# EAGLE board Thing_Plus_ESP32_C6-Panel (EAGLE 9.6.2), part 1 of 5
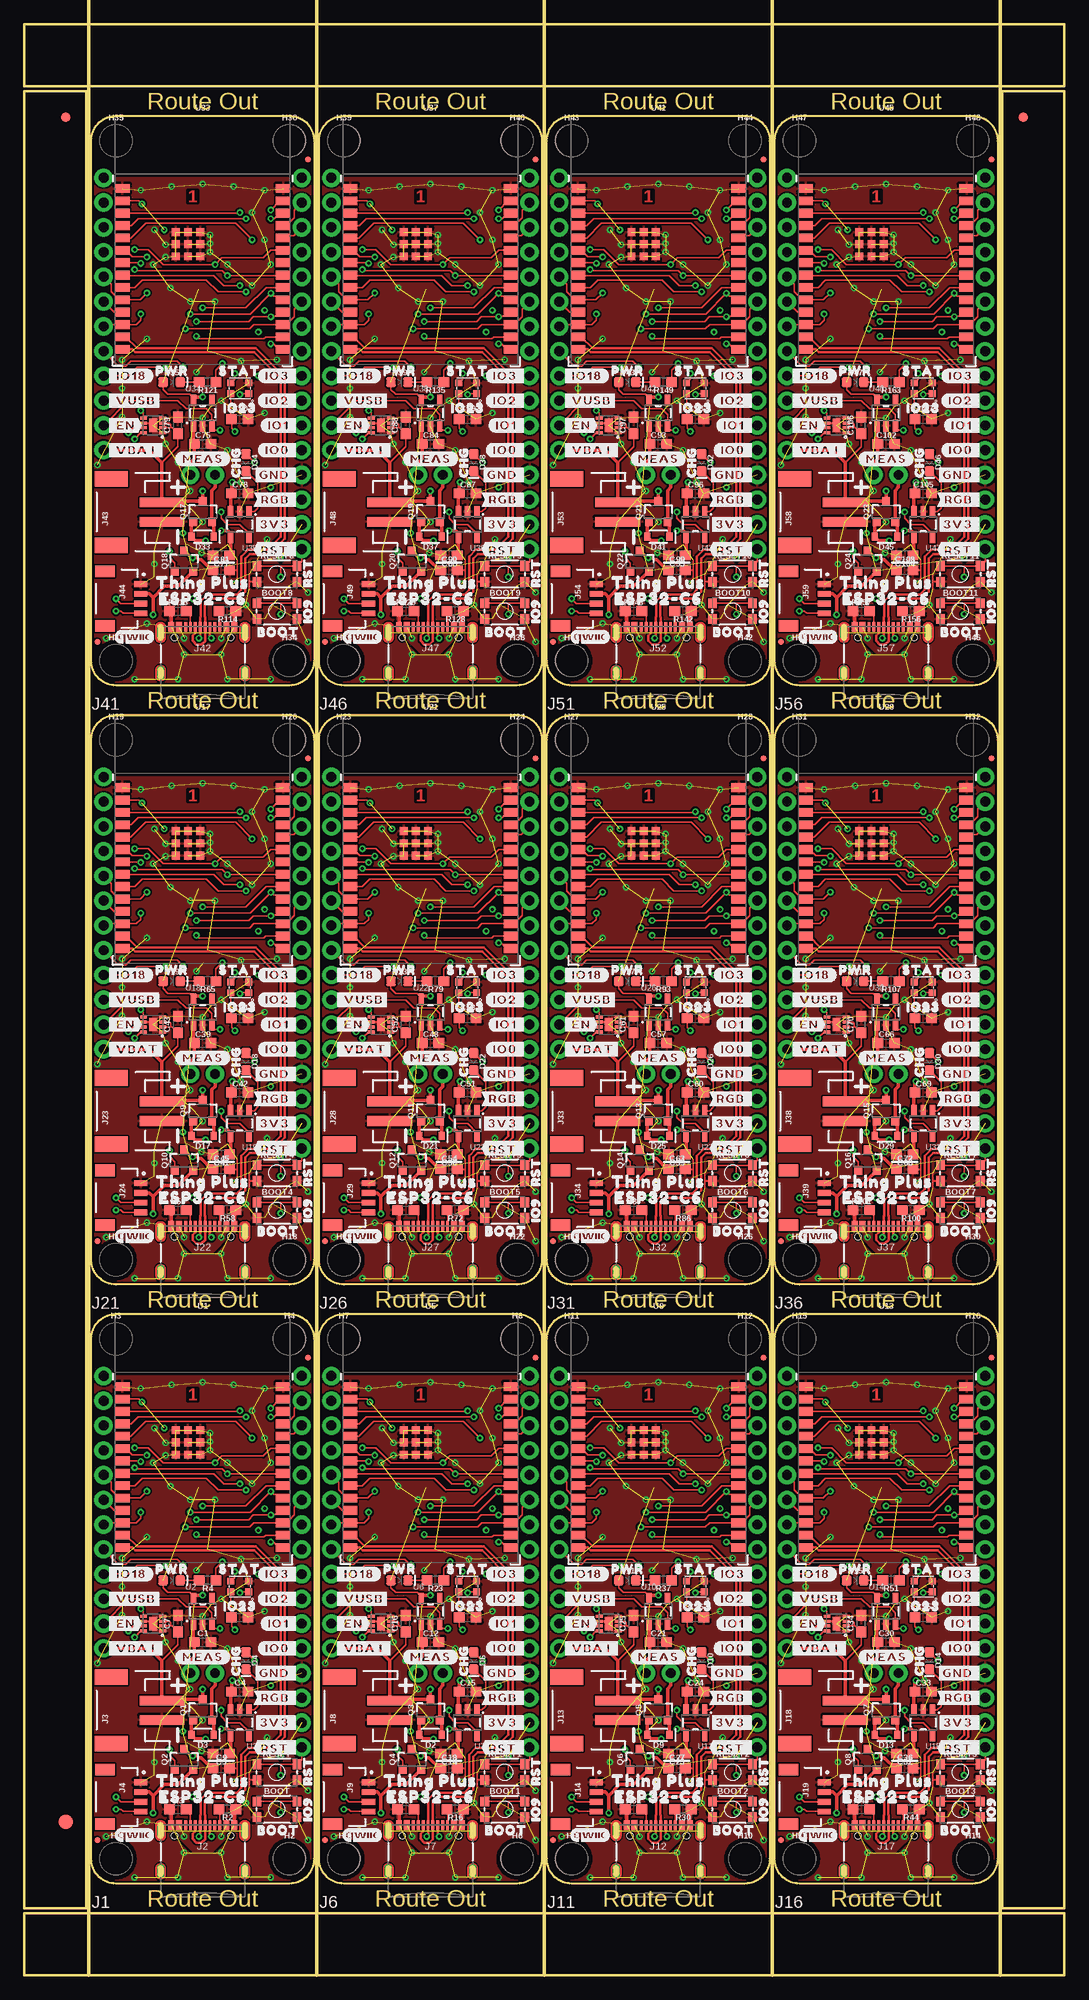
[diagram p0: board, top side]
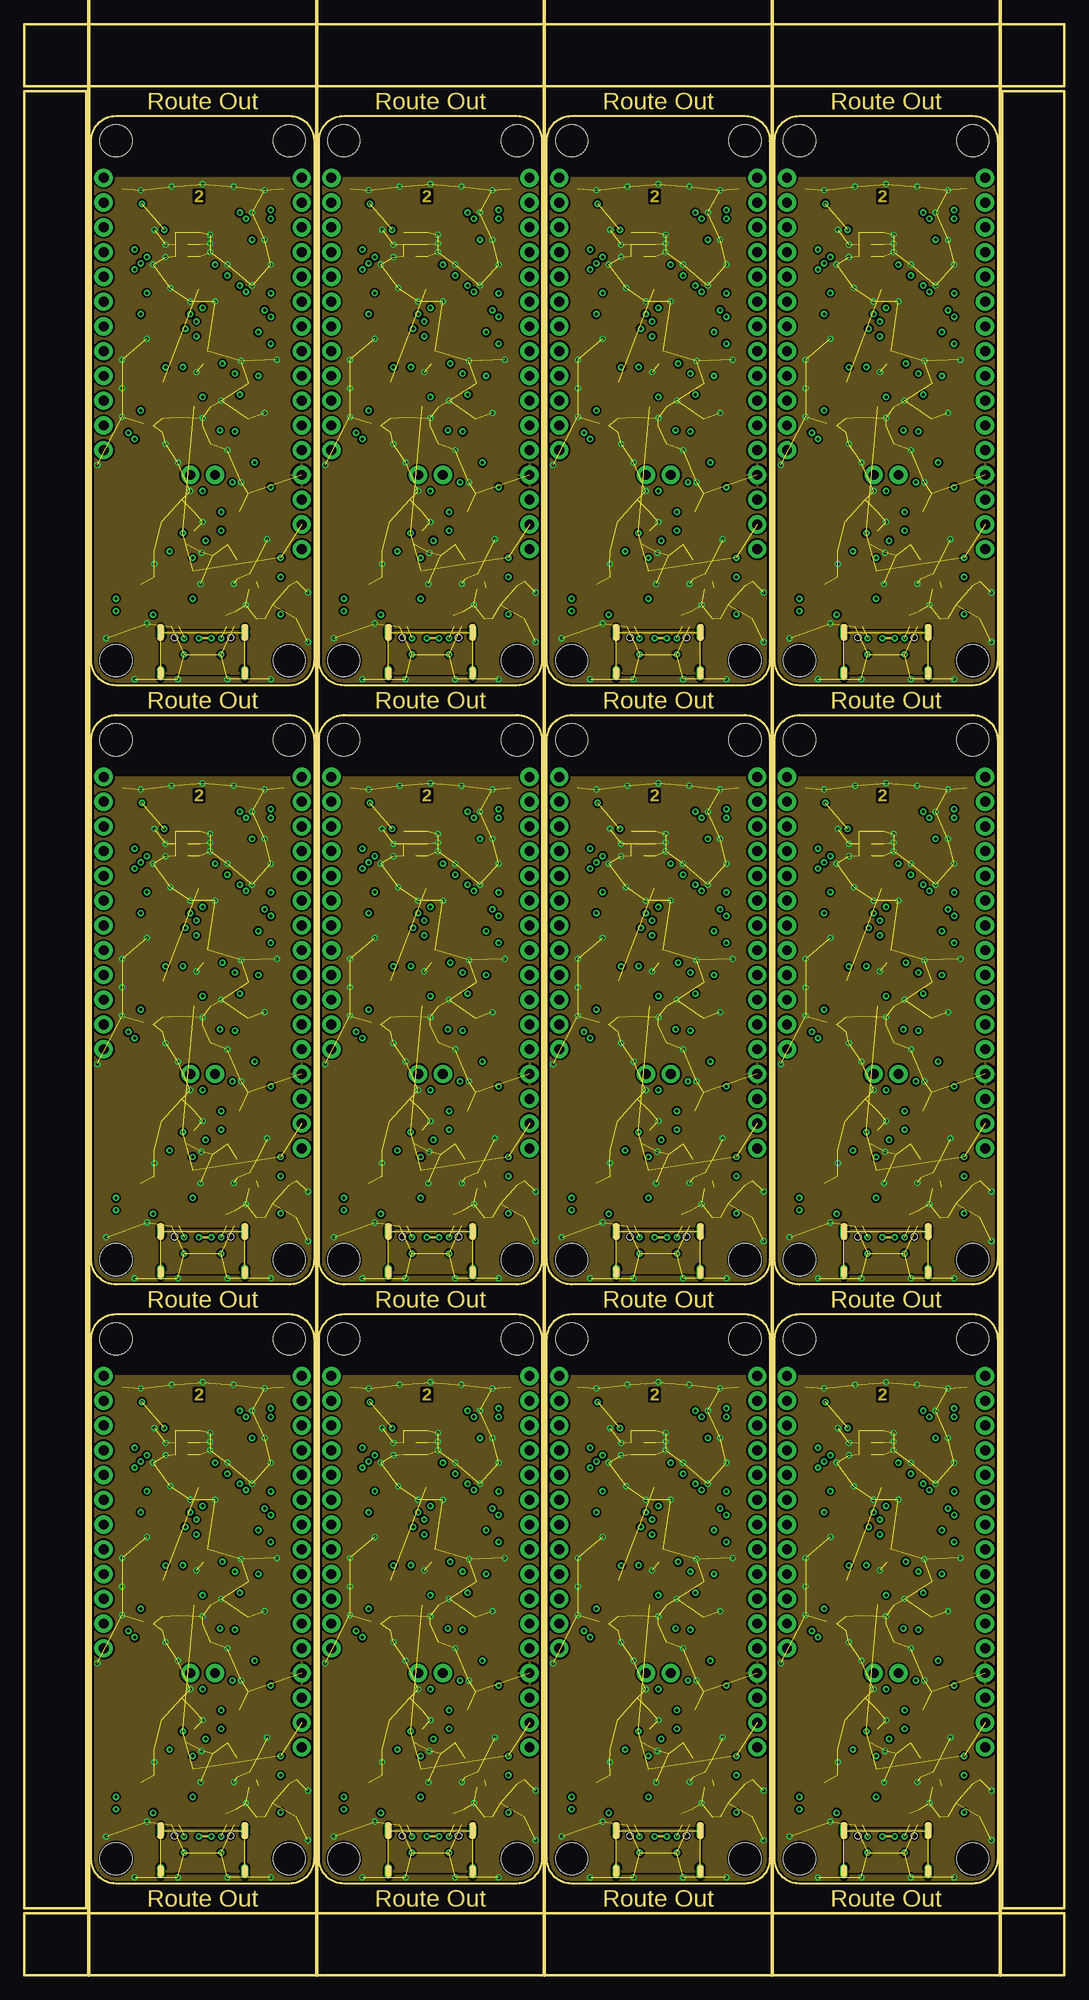
[diagram p1: board, inner layer Route2]
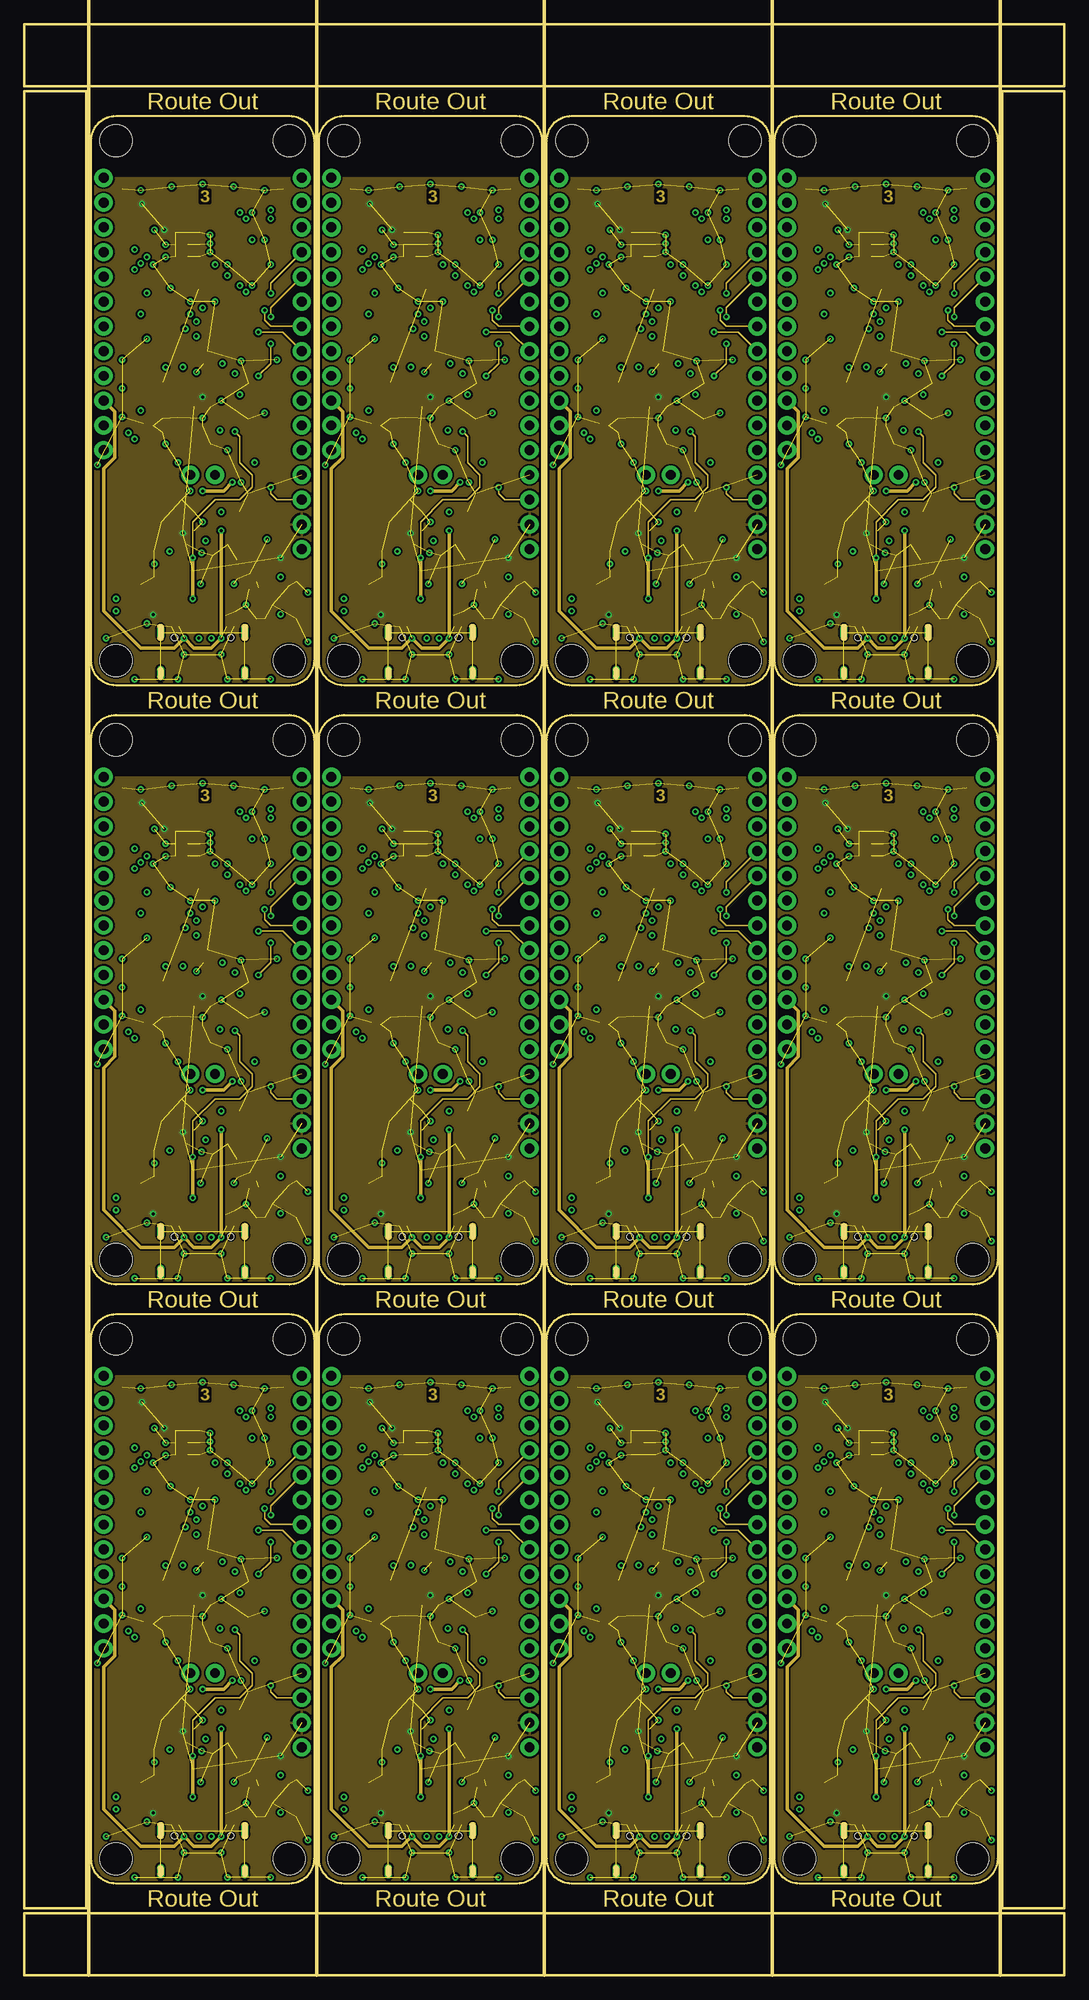
[diagram p2: board, inner layer Route15]
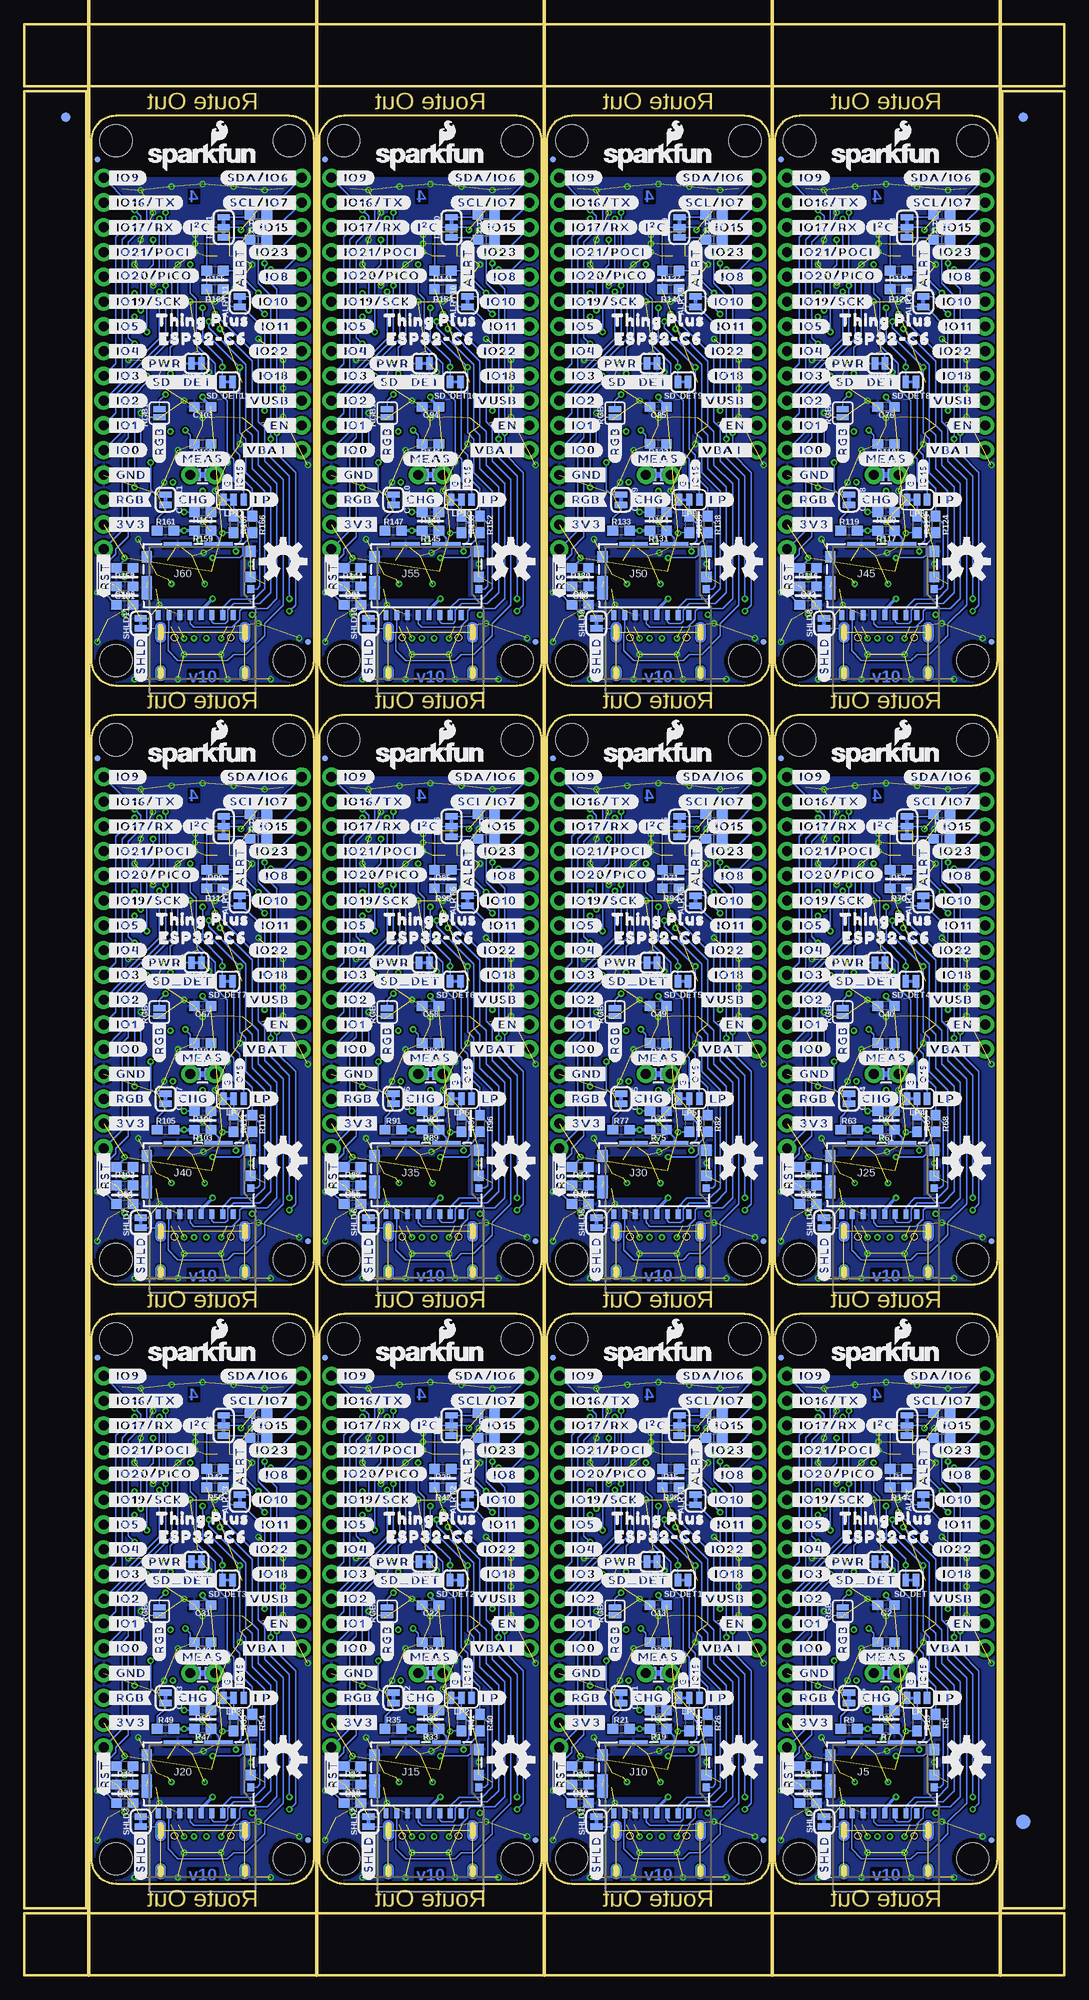
[diagram p3: board, bottom side, seen from below]

Size 106.68 x 200.15 mm. Coordinates in mm from the lower left corner, seen from the top.
Outline: 6.86,11.94 6.86,65.28 arc-90 9.4,67.82 27.18,67.82 arc-90 29.72,65.28 29.72,11.94 arc-90 27.18,9.4 9.4,9.4 arc-90 6.86,11.94
Outline: 30.23,11.94 30.23,65.28 arc-90 32.77,67.82 50.55,67.82 arc-90 53.09,65.28 53.09,11.94 arc-90 50.55,9.4 32.77,9.4 arc-90 30.23,11.94
Outline: 53.59,11.94 53.59,65.28 arc-90 56.13,67.82 73.91,67.82 arc-90 76.45,65.28 76.45,11.94 arc-90 73.91,9.4 56.13,9.4 arc-90 53.59,11.94
Outline: 76.96,11.94 76.96,65.28 arc-90 79.5,67.82 97.28,67.82 arc-90 99.82,65.28 99.82,11.94 arc-90 97.28,9.4 79.5,9.4 arc-90 76.96,11.94
Outline: 6.86,73.41 6.86,126.75 arc-90 9.4,129.29 27.18,129.29 arc-90 29.72,126.75 29.72,73.41 arc-90 27.18,70.87 9.4,70.87 arc-90 6.86,73.41
Outline: 30.23,73.41 30.23,126.75 arc-90 32.77,129.29 50.55,129.29 arc-90 53.09,126.75 53.09,73.41 arc-90 50.55,70.87 32.77,70.87 arc-90 30.23,73.41
Outline: 53.59,73.41 53.59,126.75 arc-90 56.13,129.29 73.91,129.29 arc-90 76.45,126.75 76.45,73.41 arc-90 73.91,70.87 56.13,70.87 arc-90 53.59,73.41
Outline: 76.96,73.41 76.96,126.75 arc-90 79.5,129.29 97.28,129.29 arc-90 99.82,126.75 99.82,73.41 arc-90 97.28,70.87 79.5,70.87 arc-90 76.96,73.41
Outline: 6.86,134.87 6.86,188.21 arc-90 9.4,190.75 27.18,190.75 arc-90 29.72,188.21 29.72,134.87 arc-90 27.18,132.33 9.4,132.33 arc-90 6.86,134.87
Outline: 30.23,134.87 30.23,188.21 arc-90 32.77,190.75 50.55,190.75 arc-90 53.09,188.21 53.09,134.87 arc-90 50.55,132.33 32.77,132.33 arc-90 30.23,134.87
Outline: 53.59,134.87 53.59,188.21 arc-90 56.13,190.75 73.91,190.75 arc-90 76.45,188.21 76.45,134.87 arc-90 73.91,132.33 56.13,132.33 arc-90 53.59,134.87
Outline: 76.96,134.87 76.96,188.21 arc-90 79.5,190.75 97.28,190.75 arc-90 99.82,188.21 99.82,134.87 arc-90 97.28,132.33 79.5,132.33 arc-90 76.96,134.87
Outline: 0,6.35 106.68,6.35 106.68,0 0,0 0,6.35
Outline: 100.33,193.29 106.68,193.29 106.68,6.86 100.33,6.86 100.33,193.29
Outline: 0,200.15 106.68,200.15 106.68,193.8 0,193.8 0,200.15
Outline: 0,193.29 6.35,193.29 6.35,6.86 0,6.86 0,193.29
Copper layers (1+2*15+16): Top 0.035559375mm / dielectric 0.47751875mm / Route2 0.035559375mm / dielectric 0.47751875mm / Route15 0.035559375mm / dielectric 0.47751875mm / Bottom 0.035559375mm
Design rules "Thing_Plus_ESP32_C6": minimum track width 7mil, minimum drill 12mil, track to track 7mil, track to pad 7mil, pad to pad 7mil, via to via 7mil, smd to smd 7mil, copper to edge 7mil, drill to drill 7mil, minimum pad ring 7mil, minimum via ring 7mil, stop-mask expansion 3mil, vias tented up to drill 25mil, thermal gap 10mil
Net classes: 1 USB: width 0.247 mm, clearance 0.178 mm to class 0, clearance 0.178 mm
Milling: 5 lines

## Footprints (pad centres in the part's own frame; a part is rotated, then mirrored left to right if it is on the bottom)
SMT-JUMPER_2_NC_TRACE_SILK = smd 0.66 x 1.27: 1 -0.521,0; 2 0.521,0
TACTILE_SWITCH_SMD_4.6X2.8MM = smd 0.9 x 1: 1 -2.05,-0.8; 2 2.05,-0.8; 3 2.05,0.8; 4 -2.05,0.8
0603 = smd 1.1 x 1: 1 -0.85,0; 2 0.85,0
LED-0603 = smd 1 x 1: A -0.877,0; C 0.877,0
SOD-323 = smd 0.63 x 0.83: A 1.15,0; C -1.15,0
WS2812-2020 = smd 0.7 x 0.7: DI -0.915,0.55; DO 0.915,-0.55; GND 0.915,0.55; VCC -0.915,-0.55
FIDUCIAL-1X2 = smd 1 x 1: 1 0,0
FIDUCIAL-1.5X3 = smd 1.5 x 1.5: 1 0,0
FIDUCIAL-MICRO = smd 0.635 x 0.635: 1 0,0
STAND-OFF = hole 3.302: 0,0
SMT-JUMPER_3_2-NC_TRACE_SILK = smd 0.66 x 1.27: 1 -1.041,0; 2 0,0; 3 1.041,0
THING_PLUS = drill 1.016 pad 1.88: 1 1.27,52.07; 2 1.27,49.53; 3 1.27,46.99; 4 1.27,44.45; 5 1.27,41.91; 6 1.27,39.37; 7 1.27,36.83; 8 1.27,34.29; 9 1.27,31.75; 10 1.27,29.21; 11 1.27,26.67; 12 1.27,24.13; 13 21.59,52.07; 14 21.59,49.53; 15 21.59,46.99; 16 21.59,44.45; 17 21.59,41.91; 18 21.59,39.37; 19 21.59,36.83; 20 21.59,34.29; 21 21.59,31.75; 22 21.59,29.21; 23 21.59,26.67; 24 21.59,24.13; 25 21.59,21.59; 26 21.59,19.05; 27 21.59,16.51; 28 21.59,13.97
USB-C-16P_4LAYER-PADS = smd 0.3 x 1: A5 -1.25,-0.34; A6 -0.25,-0.34; A7 0.25,-0.34; A8 1.25,-0.34; B5 1.75,-0.34; B6 0.75,-0.34; B7 -0.75,-0.34; B8 -1.75,-0.34 | smd 0.6 x 1: GND -3.225,-0.34; GND2 3.225,-0.34; VBUS1 -2.45,-0.34; VBUS2 2.45,-0.34 | drill 0.4 pad 0.6 long: SHLD1 -4.318,-0.915; SHLD2 4.318,-0.915; SHLD3 -4.318,-5.095; SHLD4 4.318,-5.095 | hole 0.65: -2.89,-1.445; 2.89,-1.445
JST-2-SMD = smd 1 x 4.6: 1 -1,-3.7; 2 1,-3.7 | smd 1.6 x 3.4: NC1 -3.4,1.5; NC2 3.4,1.5
JST04_1MM_RA = smd 0.6 x 1.35: 1 -1.5,0; 2 -0.5,0; 3 0.5,0; 4 1.5,0 | smd 1.2 x 2: NC1 2.8,-3.675; NC2 -2.8,-3.675
MICROSD_TINY = smd 0.5 x 1: 1 3.55,-3.85; 2 2.45,-3.85; 3 1.35,-3.85; 4 0.25,-3.85; 5 -0.85,-3.85; 6 -1.95,-3.85; 7 -3.05,-3.85; 8 -4.15,-3.85 | smd 0.72 x 0.78: 9 5.35,-1.17 | smd 1.05 x 1.08: GND1 5.35,0.1 | smd 1.05 x 1.2: GND2 5.35,2.71; GND3 -5.325,2.14 | smd 1.05 x 2.39: GND4 -5.325,-1.045 | smd 2.91 x 0.55: GND5 -2.145,3.385; GND6 2.045,3.385
SMT-JUMPER_3_1-NC_TRACE_SILK = smd 0.66 x 1.27: 1 -1.041,0; 2 0,0; 3 1.041,0
COMBO-JUMPER_2_NC_TRACE = smd 0.635 x 1.27: 1 -0.508,0; 2 0.508,0 | drill 1.016 pad 1.88: 3 -1.27,0; 4 1.27,0
SOT23-3 = smd 0.8 x 0.9: 1 -0.95,-1; 2 0.95,-1; 3 0,1.1
SMT-JUMPER_2_NO_SILK = smd 0.635 x 1.27: 1 -0.406,0; 2 0.406,0
ESP32-C6-WROOM-1-NARROW = smd 1.5 x 0.9: 1 -8.25,5.26; 2 -8.25,3.99; 3 -8.25,2.72; 4 -8.25,1.45; 5 -8.25,0.18; 6 -8.25,-1.09; 7 -8.25,-2.36; 8 -8.25,-3.63; 9 -8.25,-4.9; 10 -8.25,-6.17; 11 -8.25,-7.44; 12 -8.25,-8.71; 13 -8.25,-9.98; 14 -8.25,-11.25; 15 8.25,-11.25; 16 8.25,-9.98; 17 8.25,-8.71; 18 8.25,-7.44; 19 8.25,-6.17; 20 8.25,-4.9; 21 8.25,-3.63; 22 8.25,-2.36; 23 8.25,-1.09; 24 8.25,0.18; 25 8.25,1.45; 26 8.25,2.72; 27 8.25,3.99; 28 8.25,5.26 | smd 0.8 x 0.8: 29 -2.755,0.79; 30 -2.755,-0.46; 31 -2.755,-1.71; 32 -1.505,-1.71; 33 -0.255,-1.71; 34 -0.255,-0.46; 35 -0.255,0.79; 36 -1.505,0.79; 37 -1.505,-0.46
SOT23-5 = smd 0.55 x 1.2: 1 -0.95,-1.3; 2 0,-1.3; 3 0.95,-1.3; 4 0.95,1.3; 5 -0.95,1.3
DFN-8 = smd 0.3 x 0.7: 1 -0.75,-0.99; 2 -0.25,-0.99; 3 0.25,-0.99; 4 0.75,-0.99; 5 0.75,0.99; 6 0.25,0.99; 7 -0.25,0.99; 8 -0.75,0.99 | smd 1.38 x 0.8: 9 0,0

## Placement (x,y rotation side)
ALRT  JUMPER-SMT_2_NC_TRACE_SILK  [SMT-JUMPER_2_NC_TRACE_SILK]  14.48,48.77 90 bottom
ALRT1  JUMPER-SMT_2_NC_TRACE_SILK  [SMT-JUMPER_2_NC_TRACE_SILK]  37.85,48.77 90 bottom
ALRT2  JUMPER-SMT_2_NC_TRACE_SILK  [SMT-JUMPER_2_NC_TRACE_SILK]  61.21,48.77 90 bottom
ALRT3  JUMPER-SMT_2_NC_TRACE_SILK  [SMT-JUMPER_2_NC_TRACE_SILK]  84.58,48.77 90 bottom
ALRT4  JUMPER-SMT_2_NC_TRACE_SILK  [SMT-JUMPER_2_NC_TRACE_SILK]  14.48,110.24 90 bottom
ALRT5  JUMPER-SMT_2_NC_TRACE_SILK  [SMT-JUMPER_2_NC_TRACE_SILK]  37.85,110.24 90 bottom
ALRT6  JUMPER-SMT_2_NC_TRACE_SILK  [SMT-JUMPER_2_NC_TRACE_SILK]  61.21,110.24 90 bottom
ALRT7  JUMPER-SMT_2_NC_TRACE_SILK  [SMT-JUMPER_2_NC_TRACE_SILK]  84.58,110.24 90 bottom
ALRT8  JUMPER-SMT_2_NC_TRACE_SILK  [SMT-JUMPER_2_NC_TRACE_SILK]  14.48,171.7 90 bottom
ALRT9  JUMPER-SMT_2_NC_TRACE_SILK  [SMT-JUMPER_2_NC_TRACE_SILK]  37.85,171.7 90 bottom
ALRT10  JUMPER-SMT_2_NC_TRACE_SILK  [SMT-JUMPER_2_NC_TRACE_SILK]  61.21,171.7 90 bottom
ALRT11  JUMPER-SMT_2_NC_TRACE_SILK  [SMT-JUMPER_2_NC_TRACE_SILK]  84.58,171.7 90 bottom
BOOT  MOMENTARY-SWITCH-SPST-SMD-4.6X2.8MM  [TACTILE_SWITCH_SMD_4.6X2.8MM]  25.91,17.02 0 top
BOOT1  MOMENTARY-SWITCH-SPST-SMD-4.6X2.8MM  [TACTILE_SWITCH_SMD_4.6X2.8MM]  49.28,17.02 0 top
BOOT2  MOMENTARY-SWITCH-SPST-SMD-4.6X2.8MM  [TACTILE_SWITCH_SMD_4.6X2.8MM]  72.64,17.02 0 top
BOOT3  MOMENTARY-SWITCH-SPST-SMD-4.6X2.8MM  [TACTILE_SWITCH_SMD_4.6X2.8MM]  96.01,17.02 0 top
BOOT4  MOMENTARY-SWITCH-SPST-SMD-4.6X2.8MM  [TACTILE_SWITCH_SMD_4.6X2.8MM]  25.91,78.49 0 top
BOOT5  MOMENTARY-SWITCH-SPST-SMD-4.6X2.8MM  [TACTILE_SWITCH_SMD_4.6X2.8MM]  49.28,78.49 0 top
BOOT6  MOMENTARY-SWITCH-SPST-SMD-4.6X2.8MM  [TACTILE_SWITCH_SMD_4.6X2.8MM]  72.64,78.49 0 top
BOOT7  MOMENTARY-SWITCH-SPST-SMD-4.6X2.8MM  [TACTILE_SWITCH_SMD_4.6X2.8MM]  96.01,78.49 0 top
BOOT8  MOMENTARY-SWITCH-SPST-SMD-4.6X2.8MM  [TACTILE_SWITCH_SMD_4.6X2.8MM]  25.91,139.95 0 top
BOOT9  MOMENTARY-SWITCH-SPST-SMD-4.6X2.8MM  [TACTILE_SWITCH_SMD_4.6X2.8MM]  49.28,139.95 0 top
BOOT10  MOMENTARY-SWITCH-SPST-SMD-4.6X2.8MM  [TACTILE_SWITCH_SMD_4.6X2.8MM]  72.64,139.95 0 top
BOOT11  MOMENTARY-SWITCH-SPST-SMD-4.6X2.8MM  [TACTILE_SWITCH_SMD_4.6X2.8MM]  96.01,139.95 0 top
C1  2.2uF  [0603]  18.29,34.16 0 top
C2  2.2uF  [0603]  18.29,37.97 180 bottom
C3  2.2uF  [0603]  20.19,22.73 180 top
C4  2.2uF  [0603]  22.1,29.08 0 top
C5  0.1uF  [0603]  26.29,19.56 180 bottom
C6  DNP  [0603]  26.29,17.65 0 bottom
C7  0.1uF  [0603]  15.75,36.07 90 top
C8  0.1uF  [0603]  22.1,36.7 0 top
C9  10uF  [0603]  20.19,21.21 0 top
C10  0.1uF  [0603]  49.66,19.56 180 bottom
C11  DNP  [0603]  49.66,17.65 0 bottom
C12  2.2uF  [0603]  41.66,34.16 0 top
C13  2.2uF  [0603]  41.66,37.97 180 bottom
C14  2.2uF  [0603]  43.56,22.73 180 top
C15  2.2uF  [0603]  45.47,29.08 0 top
C16  0.1uF  [0603]  39.12,36.07 90 top
C17  0.1uF  [0603]  45.47,36.7 0 top
C18  10uF  [0603]  43.56,21.21 0 top
C19  0.1uF  [0603]  73.03,19.56 180 bottom
C20  DNP  [0603]  73.03,17.65 0 bottom
C21  2.2uF  [0603]  65.02,34.16 0 top
C22  2.2uF  [0603]  65.02,37.97 180 bottom
C23  2.2uF  [0603]  66.93,22.73 180 top
C24  2.2uF  [0603]  68.83,29.08 0 top
C25  0.1uF  [0603]  62.48,36.07 90 top
C26  0.1uF  [0603]  68.83,36.7 0 top
C27  10uF  [0603]  66.93,21.21 0 top
C28  0.1uF  [0603]  96.39,19.56 180 bottom
C29  DNP  [0603]  96.39,17.65 0 bottom
C30  2.2uF  [0603]  88.39,34.16 0 top
C31  2.2uF  [0603]  88.39,37.97 180 bottom
C32  2.2uF  [0603]  90.3,22.73 180 top
C33  2.2uF  [0603]  92.2,29.08 0 top
C34  0.1uF  [0603]  85.85,36.07 90 top
C35  0.1uF  [0603]  92.2,36.7 0 top
C36  10uF  [0603]  90.3,21.21 0 top
C37  0.1uF  [0603]  26.29,81.03 180 bottom
C38  DNP  [0603]  26.29,79.12 0 bottom
C39  2.2uF  [0603]  18.29,95.63 0 top
C40  2.2uF  [0603]  18.29,99.44 180 bottom
C41  2.2uF  [0603]  20.19,84.2 180 top
C42  2.2uF  [0603]  22.1,90.55 0 top
C43  0.1uF  [0603]  15.75,97.54 90 top
C44  0.1uF  [0603]  22.1,98.17 0 top
C45  10uF  [0603]  20.19,82.68 0 top
C46  0.1uF  [0603]  49.66,81.03 180 bottom
C47  DNP  [0603]  49.66,79.12 0 bottom
C48  2.2uF  [0603]  41.66,95.63 0 top
C49  2.2uF  [0603]  41.66,99.44 180 bottom
C50  2.2uF  [0603]  43.56,84.2 180 top
C51  2.2uF  [0603]  45.47,90.55 0 top
C52  0.1uF  [0603]  39.12,97.54 90 top
C53  0.1uF  [0603]  45.47,98.17 0 top
C54  10uF  [0603]  43.56,82.68 0 top
C55  0.1uF  [0603]  73.03,81.03 180 bottom
C56  DNP  [0603]  73.03,79.12 0 bottom
C57  2.2uF  [0603]  65.02,95.63 0 top
C58  2.2uF  [0603]  65.02,99.44 180 bottom
C59  2.2uF  [0603]  66.93,84.2 180 top
C60  2.2uF  [0603]  68.83,90.55 0 top
C61  0.1uF  [0603]  62.48,97.54 90 top
C62  0.1uF  [0603]  68.83,98.17 0 top
C63  10uF  [0603]  66.93,82.68 0 top
C64  0.1uF  [0603]  96.39,81.03 180 bottom
C65  DNP  [0603]  96.39,79.12 0 bottom
C66  2.2uF  [0603]  88.39,95.63 0 top
C67  2.2uF  [0603]  88.39,99.44 180 bottom
C68  2.2uF  [0603]  90.3,84.2 180 top
C69  2.2uF  [0603]  92.2,90.55 0 top
C70  0.1uF  [0603]  85.85,97.54 90 top
C71  0.1uF  [0603]  92.2,98.17 0 top
C72  10uF  [0603]  90.3,82.68 0 top
C73  0.1uF  [0603]  26.29,142.49 180 bottom
C74  DNP  [0603]  26.29,140.59 0 bottom
C75  2.2uF  [0603]  18.29,157.1 0 top
C76  2.2uF  [0603]  18.29,160.91 180 bottom
C77  2.2uF  [0603]  20.19,145.67 180 top
C78  2.2uF  [0603]  22.1,152.02 0 top
C79  0.1uF  [0603]  15.75,159 90 top
C80  0.1uF  [0603]  22.1,159.64 0 top
C81  10uF  [0603]  20.19,144.15 0 top
C82  0.1uF  [0603]  49.66,142.49 180 bottom
C83  DNP  [0603]  49.66,140.59 0 bottom
C84  2.2uF  [0603]  41.66,157.1 0 top
C85  2.2uF  [0603]  41.66,160.91 180 bottom
C86  2.2uF  [0603]  43.56,145.67 180 top
C87  2.2uF  [0603]  45.47,152.02 0 top
C88  0.1uF  [0603]  39.12,159 90 top
C89  0.1uF  [0603]  45.47,159.64 0 top
C90  10uF  [0603]  43.56,144.15 0 top
C91  0.1uF  [0603]  73.03,142.49 180 bottom
C92  DNP  [0603]  73.03,140.59 0 bottom
C93  2.2uF  [0603]  65.02,157.1 0 top
C94  2.2uF  [0603]  65.02,160.91 180 bottom
C95  2.2uF  [0603]  66.93,145.67 180 top
C96  2.2uF  [0603]  68.83,152.02 0 top
C97  0.1uF  [0603]  62.48,159 90 top
C98  0.1uF  [0603]  68.83,159.64 0 top
C99  10uF  [0603]  66.93,144.15 0 top
C100  0.1uF  [0603]  96.39,142.49 180 bottom
C101  DNP  [0603]  96.39,140.59 0 bottom
C102  2.2uF  [0603]  88.39,157.1 0 top
C103  2.2uF  [0603]  88.39,160.91 180 bottom
C104  2.2uF  [0603]  90.3,145.67 180 top
C105  2.2uF  [0603]  92.2,152.02 0 top
C106  0.1uF  [0603]  85.85,159 90 top
C107  0.1uF  [0603]  92.2,159.64 0 top
C108  10uF  [0603]  90.3,144.15 0 top
CHG  JUMPER-SMT_2_NC_TRACE_SILK  [SMT-JUMPER_2_NC_TRACE_SILK]  22.1,28.45 270 bottom
CHG1  JUMPER-SMT_2_NC_TRACE_SILK  [SMT-JUMPER_2_NC_TRACE_SILK]  45.47,28.45 270 bottom
CHG2  JUMPER-SMT_2_NC_TRACE_SILK  [SMT-JUMPER_2_NC_TRACE_SILK]  68.83,28.45 270 bottom
CHG3  JUMPER-SMT_2_NC_TRACE_SILK  [SMT-JUMPER_2_NC_TRACE_SILK]  92.2,28.45 270 bottom
CHG4  JUMPER-SMT_2_NC_TRACE_SILK  [SMT-JUMPER_2_NC_TRACE_SILK]  22.1,89.92 270 bottom
CHG5  JUMPER-SMT_2_NC_TRACE_SILK  [SMT-JUMPER_2_NC_TRACE_SILK]  45.47,89.92 270 bottom
CHG6  JUMPER-SMT_2_NC_TRACE_SILK  [SMT-JUMPER_2_NC_TRACE_SILK]  68.83,89.92 270 bottom
CHG7  JUMPER-SMT_2_NC_TRACE_SILK  [SMT-JUMPER_2_NC_TRACE_SILK]  92.2,89.92 270 bottom
CHG8  JUMPER-SMT_2_NC_TRACE_SILK  [SMT-JUMPER_2_NC_TRACE_SILK]  22.1,151.38 270 bottom
CHG9  JUMPER-SMT_2_NC_TRACE_SILK  [SMT-JUMPER_2_NC_TRACE_SILK]  45.47,151.38 270 bottom
CHG10  JUMPER-SMT_2_NC_TRACE_SILK  [SMT-JUMPER_2_NC_TRACE_SILK]  68.83,151.38 270 bottom
CHG11  JUMPER-SMT_2_NC_TRACE_SILK  [SMT-JUMPER_2_NC_TRACE_SILK]  92.2,151.38 270 bottom
D1  [LED-0603]  15.11,40.51 0 top
D2  1A/23V/620mV  [SOD-323]  41.66,24.64 180 top
D3  1A/23V/620mV  [SOD-323]  18.29,24.64 180 top
D4  Yellow  [LED-0603]  22.73,32.26 270 top
D5  WS2812_2020  [WS2812-2020]  22.1,39.88 0 top
D6  Yellow  [LED-0603]  46.1,32.26 270 top
D7  [LED-0603]  38.48,40.51 0 top
D8  WS2812_2020  [WS2812-2020]  45.47,39.88 0 top
D9  1A/23V/620mV  [SOD-323]  65.02,24.64 180 top
D10  Yellow  [LED-0603]  69.47,32.26 270 top
D11  [LED-0603]  61.85,40.51 0 top
D12  WS2812_2020  [WS2812-2020]  68.83,39.88 0 top
D13  1A/23V/620mV  [SOD-323]  88.39,24.64 180 top
D14  Yellow  [LED-0603]  92.84,32.26 270 top
D15  [LED-0603]  85.22,40.51 0 top
D16  WS2812_2020  [WS2812-2020]  92.2,39.88 0 top
D17  1A/23V/620mV  [SOD-323]  18.29,86.11 180 top
D18  Yellow  [LED-0603]  22.73,93.73 270 top
D19  [LED-0603]  15.11,101.98 0 top
D20  WS2812_2020  [WS2812-2020]  22.1,101.35 0 top
D21  1A/23V/620mV  [SOD-323]  41.66,86.11 180 top
D22  Yellow  [LED-0603]  46.1,93.73 270 top
D23  [LED-0603]  38.48,101.98 0 top
D24  WS2812_2020  [WS2812-2020]  45.47,101.35 0 top
D25  1A/23V/620mV  [SOD-323]  65.02,86.11 180 top
D26  Yellow  [LED-0603]  69.47,93.73 270 top
D27  [LED-0603]  61.85,101.98 0 top
D28  WS2812_2020  [WS2812-2020]  68.83,101.35 0 top
D29  1A/23V/620mV  [SOD-323]  88.39,86.11 180 top
D30  Yellow  [LED-0603]  92.84,93.73 270 top
D31  [LED-0603]  85.22,101.98 0 top
D32  WS2812_2020  [WS2812-2020]  92.2,101.35 0 top
D33  1A/23V/620mV  [SOD-323]  18.29,147.57 180 top
D34  Yellow  [LED-0603]  22.73,155.19 270 top
D35  [LED-0603]  15.11,163.45 0 top
D36  WS2812_2020  [WS2812-2020]  22.1,162.81 0 top
D37  1A/23V/620mV  [SOD-323]  41.66,147.57 180 top
D38  Yellow  [LED-0603]  46.1,155.19 270 top
D39  [LED-0603]  38.48,163.45 0 top
D40  WS2812_2020  [WS2812-2020]  45.47,162.81 0 top
D41  1A/23V/620mV  [SOD-323]  65.02,147.57 180 top
D42  Yellow  [LED-0603]  69.47,155.19 270 top
D43  [LED-0603]  61.85,163.45 0 top
D44  WS2812_2020  [WS2812-2020]  68.83,162.81 0 top
D45  1A/23V/620mV  [SOD-323]  88.39,147.57 180 top
D46  Yellow  [LED-0603]  92.84,155.19 270 top
D47  [LED-0603]  85.22,163.45 0 top
D48  WS2812_2020  [WS2812-2020]  92.2,162.81 0 top
E$1  [FIDUCIAL-1X2]  4.23,190.63 0 top
E$2  [FIDUCIAL-1X2]  4.23,190.63 0 bottom
E$3  [FIDUCIAL-1X2]  102.45,190.63 0 top
E$4  [FIDUCIAL-1X2]  102.45,190.63 0 bottom
E$5  [FIDUCIAL-1.5X3]  4.23,15.75 0 top
E$6  [FIDUCIAL-1.5X3]  4.23,15.75 0 bottom
FD1  FIDUCIALUFIDUCIAL  [FIDUCIAL-MICRO]  29.08,63.37 0 top
FD2  FIDUCIALUFIDUCIAL  [FIDUCIAL-MICRO]  29.08,63.37 0 bottom
FD3  FIDUCIALUFIDUCIAL  [FIDUCIAL-MICRO]  7.49,13.84 0 top
FD4  FIDUCIALUFIDUCIAL  [FIDUCIAL-MICRO]  7.49,13.84 0 bottom
FD5  FIDUCIALUFIDUCIAL  [FIDUCIAL-MICRO]  52.45,63.37 0 top
FD6  FIDUCIALUFIDUCIAL  [FIDUCIAL-MICRO]  52.45,63.37 0 bottom
FD7  FIDUCIALUFIDUCIAL  [FIDUCIAL-MICRO]  30.86,13.84 0 top
FD8  FIDUCIALUFIDUCIAL  [FIDUCIAL-MICRO]  30.86,13.84 0 bottom
FD9  FIDUCIALUFIDUCIAL  [FIDUCIAL-MICRO]  75.82,63.37 0 top
FD10  FIDUCIALUFIDUCIAL  [FIDUCIAL-MICRO]  75.82,63.37 0 bottom
FD11  FIDUCIALUFIDUCIAL  [FIDUCIAL-MICRO]  54.23,13.84 0 top
FD12  FIDUCIALUFIDUCIAL  [FIDUCIAL-MICRO]  54.23,13.84 0 bottom
FD13  FIDUCIALUFIDUCIAL  [FIDUCIAL-MICRO]  99.19,63.37 0 top
FD14  FIDUCIALUFIDUCIAL  [FIDUCIAL-MICRO]  99.19,63.37 0 bottom
FD15  FIDUCIALUFIDUCIAL  [FIDUCIAL-MICRO]  77.6,13.84 0 top
FD16  FIDUCIALUFIDUCIAL  [FIDUCIAL-MICRO]  77.6,13.84 0 bottom
FD17  FIDUCIALUFIDUCIAL  [FIDUCIAL-MICRO]  29.08,124.84 0 top
FD18  FIDUCIALUFIDUCIAL  [FIDUCIAL-MICRO]  29.08,124.84 0 bottom
FD19  FIDUCIALUFIDUCIAL  [FIDUCIAL-MICRO]  7.49,75.31 0 top
FD20  FIDUCIALUFIDUCIAL  [FIDUCIAL-MICRO]  7.49,75.31 0 bottom
FD21  FIDUCIALUFIDUCIAL  [FIDUCIAL-MICRO]  52.45,124.84 0 top
FD22  FIDUCIALUFIDUCIAL  [FIDUCIAL-MICRO]  52.45,124.84 0 bottom
FD23  FIDUCIALUFIDUCIAL  [FIDUCIAL-MICRO]  30.86,75.31 0 top
FD24  FIDUCIALUFIDUCIAL  [FIDUCIAL-MICRO]  30.86,75.31 0 bottom
FD25  FIDUCIALUFIDUCIAL  [FIDUCIAL-MICRO]  75.82,124.84 0 top
FD26  FIDUCIALUFIDUCIAL  [FIDUCIAL-MICRO]  75.82,124.84 0 bottom
FD27  FIDUCIALUFIDUCIAL  [FIDUCIAL-MICRO]  54.23,75.31 0 top
FD28  FIDUCIALUFIDUCIAL  [FIDUCIAL-MICRO]  54.23,75.31 0 bottom
FD29  FIDUCIALUFIDUCIAL  [FIDUCIAL-MICRO]  99.19,124.84 0 top
FD30  FIDUCIALUFIDUCIAL  [FIDUCIAL-MICRO]  99.19,124.84 0 bottom
FD31  FIDUCIALUFIDUCIAL  [FIDUCIAL-MICRO]  77.6,75.31 0 top
FD32  FIDUCIALUFIDUCIAL  [FIDUCIAL-MICRO]  77.6,75.31 0 bottom
FD33  FIDUCIALUFIDUCIAL  [FIDUCIAL-MICRO]  29.08,186.31 0 top
FD34  FIDUCIALUFIDUCIAL  [FIDUCIAL-MICRO]  29.08,186.31 0 bottom
FD35  FIDUCIALUFIDUCIAL  [FIDUCIAL-MICRO]  7.49,136.78 0 top
FD36  FIDUCIALUFIDUCIAL  [FIDUCIAL-MICRO]  7.49,136.78 0 bottom
FD37  FIDUCIALUFIDUCIAL  [FIDUCIAL-MICRO]  52.45,186.31 0 top
FD38  FIDUCIALUFIDUCIAL  [FIDUCIAL-MICRO]  52.45,186.31 0 bottom
FD39  FIDUCIALUFIDUCIAL  [FIDUCIAL-MICRO]  30.86,136.78 0 top
FD40  FIDUCIALUFIDUCIAL  [FIDUCIAL-MICRO]  30.86,136.78 0 bottom
FD41  FIDUCIALUFIDUCIAL  [FIDUCIAL-MICRO]  75.82,186.31 0 top
FD42  FIDUCIALUFIDUCIAL  [FIDUCIAL-MICRO]  75.82,186.31 0 bottom
FD43  FIDUCIALUFIDUCIAL  [FIDUCIAL-MICRO]  54.23,136.78 0 top
FD44  FIDUCIALUFIDUCIAL  [FIDUCIAL-MICRO]  54.23,136.78 0 bottom
FD45  FIDUCIALUFIDUCIAL  [FIDUCIAL-MICRO]  99.19,186.31 0 top
FD46  FIDUCIALUFIDUCIAL  [FIDUCIAL-MICRO]  99.19,186.31 0 bottom
FD47  FIDUCIALUFIDUCIAL  [FIDUCIAL-MICRO]  77.6,136.78 0 top
FD48  FIDUCIALUFIDUCIAL  [FIDUCIAL-MICRO]  77.6,136.78 0 bottom
H1  STAND-OFF  [STAND-OFF]  9.4,11.94 0 top
H2  STAND-OFF  [STAND-OFF]  27.18,11.94 0 top
H3  STAND-OFF  [STAND-OFF]  9.4,65.28 0 top
H4  STAND-OFF  [STAND-OFF]  27.18,65.28 0 top
H5  STAND-OFF  [STAND-OFF]  32.77,11.94 0 top
H6  STAND-OFF  [STAND-OFF]  50.55,11.94 0 top
H7  STAND-OFF  [STAND-OFF]  32.77,65.28 0 top
H8  STAND-OFF  [STAND-OFF]  50.55,65.28 0 top
H9  STAND-OFF  [STAND-OFF]  56.13,11.94 0 top
H10  STAND-OFF  [STAND-OFF]  73.91,11.94 0 top
H11  STAND-OFF  [STAND-OFF]  56.13,65.28 0 top
H12  STAND-OFF  [STAND-OFF]  73.91,65.28 0 top
H13  STAND-OFF  [STAND-OFF]  79.5,11.94 0 top
H14  STAND-OFF  [STAND-OFF]  97.28,11.94 0 top
H15  STAND-OFF  [STAND-OFF]  79.5,65.28 0 top
H16  STAND-OFF  [STAND-OFF]  97.28,65.28 0 top
H17  STAND-OFF  [STAND-OFF]  9.4,73.41 0 top
H18  STAND-OFF  [STAND-OFF]  27.18,73.41 0 top
H19  STAND-OFF  [STAND-OFF]  9.4,126.75 0 top
H20  STAND-OFF  [STAND-OFF]  27.18,126.75 0 top
H21  STAND-OFF  [STAND-OFF]  32.77,73.41 0 top
H22  STAND-OFF  [STAND-OFF]  50.55,73.41 0 top
H23  STAND-OFF  [STAND-OFF]  32.77,126.75 0 top
H24  STAND-OFF  [STAND-OFF]  50.55,126.75 0 top
H25  STAND-OFF  [STAND-OFF]  56.13,73.41 0 top
H26  STAND-OFF  [STAND-OFF]  73.91,73.41 0 top
H27  STAND-OFF  [STAND-OFF]  56.13,126.75 0 top
H28  STAND-OFF  [STAND-OFF]  73.91,126.75 0 top
H29  STAND-OFF  [STAND-OFF]  79.5,73.41 0 top
H30  STAND-OFF  [STAND-OFF]  97.28,73.41 0 top
H31  STAND-OFF  [STAND-OFF]  79.5,126.75 0 top
H32  STAND-OFF  [STAND-OFF]  97.28,126.75 0 top
H33  STAND-OFF  [STAND-OFF]  9.4,134.87 0 top
H34  STAND-OFF  [STAND-OFF]  27.18,134.87 0 top
H35  STAND-OFF  [STAND-OFF]  9.4,188.21 0 top
H36  STAND-OFF  [STAND-OFF]  27.18,188.21 0 top
H37  STAND-OFF  [STAND-OFF]  32.77,134.87 0 top
H38  STAND-OFF  [STAND-OFF]  50.55,134.87 0 top
H39  STAND-OFF  [STAND-OFF]  32.77,188.21 0 top
H40  STAND-OFF  [STAND-OFF]  50.55,188.21 0 top
H41  STAND-OFF  [STAND-OFF]  56.13,134.87 0 top
H42  STAND-OFF  [STAND-OFF]  73.91,134.87 0 top
H43  STAND-OFF  [STAND-OFF]  56.13,188.21 0 top
H44  STAND-OFF  [STAND-OFF]  73.91,188.21 0 top
H45  STAND-OFF  [STAND-OFF]  79.5,134.87 0 top
H46  STAND-OFF  [STAND-OFF]  97.28,134.87 0 top
H47  STAND-OFF  [STAND-OFF]  79.5,188.21 0 top
H48  STAND-OFF  [STAND-OFF]  97.28,188.21 0 top
I2C  JUMPER-SMT_3_2-NC_TRACE_SILK  [SMT-JUMPER_3_2-NC_TRACE_SILK]  16.13,56.39 90 bottom
I2C1  JUMPER-SMT_3_2-NC_TRACE_SILK  [SMT-JUMPER_3_2-NC_TRACE_SILK]  39.5,56.39 90 bottom
I2C2  JUMPER-SMT_3_2-NC_TRACE_SILK  [SMT-JUMPER_3_2-NC_TRACE_SILK]  62.86,56.39 90 bottom
I2C3  JUMPER-SMT_3_2-NC_TRACE_SILK  [SMT-JUMPER_3_2-NC_TRACE_SILK]  86.23,56.39 90 bottom
I2C4  JUMPER-SMT_3_2-NC_TRACE_SILK  [SMT-JUMPER_3_2-NC_TRACE_SILK]  16.13,117.86 90 bottom
I2C5  JUMPER-SMT_3_2-NC_TRACE_SILK  [SMT-JUMPER_3_2-NC_TRACE_SILK]  39.5,117.86 90 bottom
I2C6  JUMPER-SMT_3_2-NC_TRACE_SILK  [SMT-JUMPER_3_2-NC_TRACE_SILK]  62.86,117.86 90 bottom
I2C7  JUMPER-SMT_3_2-NC_TRACE_SILK  [SMT-JUMPER_3_2-NC_TRACE_SILK]  86.23,117.86 90 bottom
I2C8  JUMPER-SMT_3_2-NC_TRACE_SILK  [SMT-JUMPER_3_2-NC_TRACE_SILK]  16.13,179.32 90 bottom
I2C9  JUMPER-SMT_3_2-NC_TRACE_SILK  [SMT-JUMPER_3_2-NC_TRACE_SILK]  39.5,179.32 90 bottom
I2C10  JUMPER-SMT_3_2-NC_TRACE_SILK  [SMT-JUMPER_3_2-NC_TRACE_SILK]  62.86,179.32 90 bottom
I2C11  JUMPER-SMT_3_2-NC_TRACE_SILK  [SMT-JUMPER_3_2-NC_TRACE_SILK]  86.23,179.32 90 bottom
J1  THING_PLUS_LOGICAL  [THING_PLUS]  6.86,9.4 0 top
J2  [USB-C-16P_4LAYER-PADS]  18.29,15.75 0 top
J3  [JST-2-SMD]  10.41,27.18 90 top
J4  QWIIC_RIGHT_ANGLE  [JST04_1MM_RA]  11.94,18.29 270 top
J5  MICRO-SDFRICTION  [MICROSD_TINY]  18.69,20.45 0 bottom
J6  THING_PLUS_LOGICAL  [THING_PLUS]  30.23,9.4 0 top
J7  [USB-C-16P_4LAYER-PADS]  41.66,15.75 0 top
J8  [JST-2-SMD]  33.78,27.18 90 top
J9  QWIIC_RIGHT_ANGLE  [JST04_1MM_RA]  35.31,18.29 270 top
J10  MICRO-SDFRICTION  [MICROSD_TINY]  42.06,20.45 0 bottom
J11  THING_PLUS_LOGICAL  [THING_PLUS]  53.59,9.4 0 top
J12  [USB-C-16P_4LAYER-PADS]  65.02,15.75 0 top
J13  [JST-2-SMD]  57.15,27.18 90 top
J14  QWIIC_RIGHT_ANGLE  [JST04_1MM_RA]  58.67,18.29 270 top
J15  MICRO-SDFRICTION  [MICROSD_TINY]  65.43,20.45 0 bottom
J16  THING_PLUS_LOGICAL  [THING_PLUS]  76.96,9.4 0 top
J17  [USB-C-16P_4LAYER-PADS]  88.39,15.75 0 top
J18  [JST-2-SMD]  80.52,27.18 90 top
J19  QWIIC_RIGHT_ANGLE  [JST04_1MM_RA]  82.04,18.29 270 top
J20  MICRO-SDFRICTION  [MICROSD_TINY]  88.8,20.45 0 bottom
J21  THING_PLUS_LOGICAL  [THING_PLUS]  6.86,70.87 0 top
J22  [USB-C-16P_4LAYER-PADS]  18.29,77.22 0 top
J23  [JST-2-SMD]  10.41,88.65 90 top
J24  QWIIC_RIGHT_ANGLE  [JST04_1MM_RA]  11.94,79.76 270 top
J25  MICRO-SDFRICTION  [MICROSD_TINY]  18.69,81.91 0 bottom
J26  THING_PLUS_LOGICAL  [THING_PLUS]  30.23,70.87 0 top
J27  [USB-C-16P_4LAYER-PADS]  41.66,77.22 0 top
J28  [JST-2-SMD]  33.78,88.65 90 top
J29  QWIIC_RIGHT_ANGLE  [JST04_1MM_RA]  35.31,79.76 270 top
J30  MICRO-SDFRICTION  [MICROSD_TINY]  42.06,81.91 0 bottom
J31  THING_PLUS_LOGICAL  [THING_PLUS]  53.59,70.87 0 top
J32  [USB-C-16P_4LAYER-PADS]  65.02,77.22 0 top
J33  [JST-2-SMD]  57.15,88.65 90 top
J34  QWIIC_RIGHT_ANGLE  [JST04_1MM_RA]  58.67,79.76 270 top
J35  MICRO-SDFRICTION  [MICROSD_TINY]  65.43,81.91 0 bottom
J36  THING_PLUS_LOGICAL  [THING_PLUS]  76.96,70.87 0 top
J37  [USB-C-16P_4LAYER-PADS]  88.39,77.22 0 top
J38  [JST-2-SMD]  80.52,88.65 90 top
J39  QWIIC_RIGHT_ANGLE  [JST04_1MM_RA]  82.04,79.76 270 top
J40  MICRO-SDFRICTION  [MICROSD_TINY]  88.8,81.91 0 bottom
J41  THING_PLUS_LOGICAL  [THING_PLUS]  6.86,132.33 0 top
J42  [USB-C-16P_4LAYER-PADS]  18.29,138.68 0 top
J43  [JST-2-SMD]  10.41,150.11 90 top
J44  QWIIC_RIGHT_ANGLE  [JST04_1MM_RA]  11.94,141.22 270 top
J45  MICRO-SDFRICTION  [MICROSD_TINY]  18.69,143.38 0 bottom
J46  THING_PLUS_LOGICAL  [THING_PLUS]  30.23,132.33 0 top
J47  [USB-C-16P_4LAYER-PADS]  41.66,138.68 0 top
J48  [JST-2-SMD]  33.78,150.11 90 top
J49  QWIIC_RIGHT_ANGLE  [JST04_1MM_RA]  35.31,141.22 270 top
J50  MICRO-SDFRICTION  [MICROSD_TINY]  42.06,143.38 0 bottom
J51  THING_PLUS_LOGICAL  [THING_PLUS]  53.59,132.33 0 top
J52  [USB-C-16P_4LAYER-PADS]  65.02,138.68 0 top
J53  [JST-2-SMD]  57.15,150.11 90 top
J54  QWIIC_RIGHT_ANGLE  [JST04_1MM_RA]  58.67,141.22 270 top
J55  MICRO-SDFRICTION  [MICROSD_TINY]  65.43,143.38 0 bottom
J56  THING_PLUS_LOGICAL  [THING_PLUS]  76.96,132.33 0 top
J57  [USB-C-16P_4LAYER-PADS]  88.39,138.68 0 top
J58  [JST-2-SMD]  80.52,150.11 90 top
J59  QWIIC_RIGHT_ANGLE  [JST04_1MM_RA]  82.04,141.22 270 top
J60  MICRO-SDFRICTION  [MICROSD_TINY]  88.8,143.38 0 bottom
LOGO1  SFE_LOGO_NAME_FLAME.1_INCH  [SFE_LOGO_NAME_FLAME_.1]  18.29,63.63 0 bottom
LOGO2  QWIIC_LOGO_4MM  [QWIIC_4MM]  11.3,14.35 0 top
LOGO3  OSHW-LOGOM  [OSHW-LOGO-M]  10.03,22.1 0 bottom
LOGO4  SFE_LOGO_NAME_FLAME.1_INCH  [SFE_LOGO_NAME_FLAME_.1]  41.66,63.63 0 bottom
LOGO5  QWIIC_LOGO_4MM  [QWIIC_4MM]  34.67,14.35 0 top
LOGO6  OSHW-LOGOM  [OSHW-LOGO-M]  33.4,22.1 0 bottom
LOGO7  SFE_LOGO_NAME_FLAME.1_INCH  [SFE_LOGO_NAME_FLAME_.1]  65.02,63.63 0 bottom
LOGO8  QWIIC_LOGO_4MM  [QWIIC_4MM]  58.04,14.35 0 top
LOGO9  OSHW-LOGOM  [OSHW-LOGO-M]  56.77,22.1 0 bottom
LOGO10  SFE_LOGO_NAME_FLAME.1_INCH  [SFE_LOGO_NAME_FLAME_.1]  88.39,63.63 0 bottom
LOGO11  QWIIC_LOGO_4MM  [QWIIC_4MM]  81.41,14.35 0 top
LOGO12  OSHW-LOGOM  [OSHW-LOGO-M]  80.14,22.1 0 bottom
LOGO13  SFE_LOGO_NAME_FLAME.1_INCH  [SFE_LOGO_NAME_FLAME_.1]  18.29,125.09 0 bottom
LOGO14  QWIIC_LOGO_4MM  [QWIIC_4MM]  11.3,75.82 0 top
LOGO15  OSHW-LOGOM  [OSHW-LOGO-M]  10.03,83.57 0 bottom
LOGO16  SFE_LOGO_NAME_FLAME.1_INCH  [SFE_LOGO_NAME_FLAME_.1]  41.66,125.09 0 bottom
LOGO17  QWIIC_LOGO_4MM  [QWIIC_4MM]  34.67,75.82 0 top
LOGO18  OSHW-LOGOM  [OSHW-LOGO-M]  33.4,83.57 0 bottom
LOGO19  SFE_LOGO_NAME_FLAME.1_INCH  [SFE_LOGO_NAME_FLAME_.1]  65.02,125.09 0 bottom
LOGO20  QWIIC_LOGO_4MM  [QWIIC_4MM]  58.04,75.82 0 top
LOGO21  OSHW-LOGOM  [OSHW-LOGO-M]  56.77,83.57 0 bottom
LOGO22  SFE_LOGO_NAME_FLAME.1_INCH  [SFE_LOGO_NAME_FLAME_.1]  88.39,125.09 0 bottom
LOGO23  QWIIC_LOGO_4MM  [QWIIC_4MM]  81.41,75.82 0 top
LOGO24  OSHW-LOGOM  [OSHW-LOGO-M]  80.14,83.57 0 bottom
LOGO25  SFE_LOGO_NAME_FLAME.1_INCH  [SFE_LOGO_NAME_FLAME_.1]  18.29,186.56 0 bottom
LOGO26  QWIIC_LOGO_4MM  [QWIIC_4MM]  11.3,137.29 0 top
LOGO27  OSHW-LOGOM  [OSHW-LOGO-M]  10.03,145.03 0 bottom
LOGO28  SFE_LOGO_NAME_FLAME.1_INCH  [SFE_LOGO_NAME_FLAME_.1]  41.66,186.56 0 bottom
LOGO29  QWIIC_LOGO_4MM  [QWIIC_4MM]  34.67,137.29 0 top
LOGO30  OSHW-LOGOM  [OSHW-LOGO-M]  33.4,145.03 0 bottom
LOGO31  SFE_LOGO_NAME_FLAME.1_INCH  [SFE_LOGO_NAME_FLAME_.1]  65.02,186.56 0 bottom
LOGO32  QWIIC_LOGO_4MM  [QWIIC_4MM]  58.04,137.29 0 top
LOGO33  OSHW-LOGOM  [OSHW-LOGO-M]  56.77,145.03 0 bottom
LOGO34  SFE_LOGO_NAME_FLAME.1_INCH  [SFE_LOGO_NAME_FLAME_.1]  88.39,186.56 0 bottom
LOGO35  QWIIC_LOGO_4MM  [QWIIC_4MM]  81.41,137.29 0 top
LOGO36  OSHW-LOGOM  [OSHW-LOGO-M]  80.14,145.03 0 bottom
LP  JUMPER-SMT_3_1-NC_TRACE_SILK  [SMT-JUMPER_3_1-NC_TRACE_SILK]  15.11,28.45 180 bottom
LP1  JUMPER-SMT_3_1-NC_TRACE_SILK  [SMT-JUMPER_3_1-NC_TRACE_SILK]  38.48,28.45 180 bottom
LP2  JUMPER-SMT_3_1-NC_TRACE_SILK  [SMT-JUMPER_3_1-NC_TRACE_SILK]  61.85,28.45 180 bottom
LP3  JUMPER-SMT_3_1-NC_TRACE_SILK  [SMT-JUMPER_3_1-NC_TRACE_SILK]  85.22,28.45 180 bottom
LP4  JUMPER-SMT_3_1-NC_TRACE_SILK  [SMT-JUMPER_3_1-NC_TRACE_SILK]  15.11,89.92 180 bottom
LP5  JUMPER-SMT_3_1-NC_TRACE_SILK  [SMT-JUMPER_3_1-NC_TRACE_SILK]  38.48,89.92 180 bottom
LP6  JUMPER-SMT_3_1-NC_TRACE_SILK  [SMT-JUMPER_3_1-NC_TRACE_SILK]  61.85,89.92 180 bottom
LP7  JUMPER-SMT_3_1-NC_TRACE_SILK  [SMT-JUMPER_3_1-NC_TRACE_SILK]  85.22,89.92 180 bottom
LP8  JUMPER-SMT_3_1-NC_TRACE_SILK  [SMT-JUMPER_3_1-NC_TRACE_SILK]  15.11,151.38 180 bottom
LP9  JUMPER-SMT_3_1-NC_TRACE_SILK  [SMT-JUMPER_3_1-NC_TRACE_SILK]  38.48,151.38 180 bottom
LP10  JUMPER-SMT_3_1-NC_TRACE_SILK  [SMT-JUMPER_3_1-NC_TRACE_SILK]  61.85,151.38 180 bottom
LP11  JUMPER-SMT_3_1-NC_TRACE_SILK  [SMT-JUMPER_3_1-NC_TRACE_SILK]  85.22,151.38 180 bottom
MEAS  JUMPER-COMBO_2_NC_TRACE  [COMBO-JUMPER_2_NC_TRACE]  18.29,30.99 0 bottom
MEAS1  JUMPER-COMBO_2_NC_TRACE  [COMBO-JUMPER_2_NC_TRACE]  41.66,30.99 0 bottom
MEAS2  JUMPER-COMBO_2_NC_TRACE  [COMBO-JUMPER_2_NC_TRACE]  65.02,30.99 0 bottom
MEAS3  JUMPER-COMBO_2_NC_TRACE  [COMBO-JUMPER_2_NC_TRACE]  88.39,30.99 0 bottom
MEAS4  JUMPER-COMBO_2_NC_TRACE  [COMBO-JUMPER_2_NC_TRACE]  18.29,92.46 0 bottom
MEAS5  JUMPER-COMBO_2_NC_TRACE  [COMBO-JUMPER_2_NC_TRACE]  41.66,92.46 0 bottom
MEAS6  JUMPER-COMBO_2_NC_TRACE  [COMBO-JUMPER_2_NC_TRACE]  65.02,92.46 0 bottom
MEAS7  JUMPER-COMBO_2_NC_TRACE  [COMBO-JUMPER_2_NC_TRACE]  88.39,92.46 0 bottom
MEAS8  JUMPER-COMBO_2_NC_TRACE  [COMBO-JUMPER_2_NC_TRACE]  18.29,153.92 0 bottom
MEAS9  JUMPER-COMBO_2_NC_TRACE  [COMBO-JUMPER_2_NC_TRACE]  41.66,153.92 0 bottom
MEAS10  JUMPER-COMBO_2_NC_TRACE  [COMBO-JUMPER_2_NC_TRACE]  65.02,153.92 0 bottom
MEAS11  JUMPER-COMBO_2_NC_TRACE  [COMBO-JUMPER_2_NC_TRACE]  88.39,153.92 0 bottom
PWR  JUMPER-SMT_2_NC_TRACE_SILK  [SMT-JUMPER_2_NC_TRACE_SILK]  18.92,42.42 180 bottom
PWR1  JUMPER-SMT_2_NC_TRACE_SILK  [SMT-JUMPER_2_NC_TRACE_SILK]  42.29,42.42 180 bottom
PWR2  JUMPER-SMT_2_NC_TRACE_SILK  [SMT-JUMPER_2_NC_TRACE_SILK]  65.66,42.42 180 bottom
PWR3  JUMPER-SMT_2_NC_TRACE_SILK  [SMT-JUMPER_2_NC_TRACE_SILK]  89.03,42.42 180 bottom
PWR4  JUMPER-SMT_2_NC_TRACE_SILK  [SMT-JUMPER_2_NC_TRACE_SILK]  18.92,103.89 180 bottom
PWR5  JUMPER-SMT_2_NC_TRACE_SILK  [SMT-JUMPER_2_NC_TRACE_SILK]  42.29,103.89 180 bottom
PWR6  JUMPER-SMT_2_NC_TRACE_SILK  [SMT-JUMPER_2_NC_TRACE_SILK]  65.66,103.89 180 bottom
PWR7  JUMPER-SMT_2_NC_TRACE_SILK  [SMT-JUMPER_2_NC_TRACE_SILK]  89.03,103.89 180 bottom
PWR8  JUMPER-SMT_2_NC_TRACE_SILK  [SMT-JUMPER_2_NC_TRACE_SILK]  18.92,165.35 180 bottom
PWR9  JUMPER-SMT_2_NC_TRACE_SILK  [SMT-JUMPER_2_NC_TRACE_SILK]  42.29,165.35 180 bottom
PWR10  JUMPER-SMT_2_NC_TRACE_SILK  [SMT-JUMPER_2_NC_TRACE_SILK]  65.66,165.35 180 bottom
PWR11  JUMPER-SMT_2_NC_TRACE_SILK  [SMT-JUMPER_2_NC_TRACE_SILK]  89.03,165.35 180 bottom
Q1  20V/4.2A/52mΩ/1.4W  [SOT23-3]  18.29,27.18 0 top
Q2  20V/4.2A/52mΩ/1.4W  [SOT23-3]  16.38,22.1 0 top
Q3  20V/4.2A/52mΩ/1.4W  [SOT23-3]  41.66,27.18 0 top
Q4  20V/4.2A/52mΩ/1.4W  [SOT23-3]  39.75,22.1 0 top
Q5  20V/4.2A/52mΩ/1.4W  [SOT23-3]  65.02,27.18 0 top
Q6  20V/4.2A/52mΩ/1.4W  [SOT23-3]  63.12,22.1 0 top
Q7  20V/4.2A/52mΩ/1.4W  [SOT23-3]  88.39,27.18 0 top
Q8  20V/4.2A/52mΩ/1.4W  [SOT23-3]  86.49,22.1 0 top
Q9  20V/4.2A/52mΩ/1.4W  [SOT23-3]  18.29,88.65 0 top
Q10  20V/4.2A/52mΩ/1.4W  [SOT23-3]  16.38,83.57 0 top
Q11  20V/4.2A/52mΩ/1.4W  [SOT23-3]  41.66,88.65 0 top
Q12  20V/4.2A/52mΩ/1.4W  [SOT23-3]  39.75,83.57 0 top
Q13  20V/4.2A/52mΩ/1.4W  [SOT23-3]  65.02,88.65 0 top
Q14  20V/4.2A/52mΩ/1.4W  [SOT23-3]  63.12,83.57 0 top
Q15  20V/4.2A/52mΩ/1.4W  [SOT23-3]  88.39,88.65 0 top
Q16  20V/4.2A/52mΩ/1.4W  [SOT23-3]  86.49,83.57 0 top
Q17  20V/4.2A/52mΩ/1.4W  [SOT23-3]  18.29,150.11 0 top
Q18  20V/4.2A/52mΩ/1.4W  [SOT23-3]  16.38,145.03 0 top
Q19  20V/4.2A/52mΩ/1.4W  [SOT23-3]  41.66,150.11 0 top
Q20  20V/4.2A/52mΩ/1.4W  [SOT23-3]  39.75,145.03 0 top
Q21  20V/4.2A/52mΩ/1.4W  [SOT23-3]  65.02,150.11 0 top
Q22  20V/4.2A/52mΩ/1.4W  [SOT23-3]  63.12,145.03 0 top
Q23  20V/4.2A/52mΩ/1.4W  [SOT23-3]  88.39,150.11 0 top
Q24  20V/4.2A/52mΩ/1.4W  [SOT23-3]  86.49,145.03 0 top
R1  100k  [0603]  17.02,51.94 180 bottom
R2  5.1k  [0603]  20.83,17.02 180 top
R3  5.1k  [0603]  15.75,17.02 0 top
R4  4.7k  [0603]  18.8,40.51 180 top
R5  100k  [0603]  13.21,25.91 270 bottom
R6  2.2k  [0603]  12.57,57.66 180 bottom
R7  100k  [0603]  18.29,25.27 180 bottom
R8  100k  [0603]  18.29,34.16 180 bottom
R9  4.7k  [0603]  22.1,25.27 0 bottom
R10  4.7k  [0603]  18.29,27.18 180 bottom
R11  100k  [0603]  26.29,21.46 180 bottom
R12  2.2k  [0603]  12.57,55.12 0 bottom
R13  100k  [0603]  15.11,25.91 270 bottom
R14  100k  [0603]  17.02,50.04 180 bottom
R15  100k  [0603]  40.39,51.94 180 bottom
R16  5.1k  [0603]  44.2,17.02 180 top
R17  5.1k  [0603]  39.12,17.02 0 top
R18  100k  [0603]  49.66,21.46 180 bottom
R19  100k  [0603]  41.66,25.27 180 bottom
R20  100k  [0603]  41.66,34.16 180 bottom
R21  4.7k  [0603]  45.47,25.27 0 bottom
R22  4.7k  [0603]  41.66,27.18 180 bottom
R23  4.7k  [0603]  42.16,40.51 180 top
R24  2.2k  [0603]  35.94,57.66 180 bottom
R25  2.2k  [0603]  35.94,55.12 0 bottom
R26  100k  [0603]  36.58,25.91 270 bottom
R27  100k  [0603]  38.48,25.91 270 bottom
R28  100k  [0603]  40.39,50.04 180 bottom
R29  100k  [0603]  63.75,51.94 180 bottom
R30  5.1k  [0603]  67.56,17.02 180 top
R31  5.1k  [0603]  62.48,17.02 0 top
R32  100k  [0603]  73.03,21.46 180 bottom
R33  100k  [0603]  65.02,25.27 180 bottom
R34  100k  [0603]  65.02,34.16 180 bottom
R35  4.7k  [0603]  68.83,25.27 0 bottom
R36  4.7k  [0603]  65.02,27.18 180 bottom
R37  4.7k  [0603]  65.53,40.51 180 top
R38  2.2k  [0603]  59.31,57.66 180 bottom
R39  2.2k  [0603]  59.31,55.12 0 bottom
R40  100k  [0603]  59.94,25.91 270 bottom
R41  100k  [0603]  61.85,25.91 270 bottom
R42  100k  [0603]  63.75,50.04 180 bottom
R43  100k  [0603]  87.12,51.94 180 bottom
R44  5.1k  [0603]  90.93,17.02 180 top
R45  5.1k  [0603]  85.85,17.02 0 top
R46  100k  [0603]  96.39,21.46 180 bottom
R47  100k  [0603]  88.39,25.27 180 bottom
R48  100k  [0603]  88.39,34.16 180 bottom
R49  4.7k  [0603]  92.2,25.27 0 bottom
R50  4.7k  [0603]  88.39,27.18 180 bottom
R51  4.7k  [0603]  88.9,40.51 180 top
R52  2.2k  [0603]  82.68,57.66 180 bottom
R53  2.2k  [0603]  82.68,55.12 0 bottom
R54  100k  [0603]  83.31,25.91 270 bottom
R55  100k  [0603]  85.22,25.91 270 bottom
R56  100k  [0603]  87.12,50.04 180 bottom
R57  100k  [0603]  17.02,113.41 180 bottom
R58  5.1k  [0603]  20.83,78.49 180 top
R59  5.1k  [0603]  15.75,78.49 0 top
R60  100k  [0603]  26.29,82.93 180 bottom
R61  100k  [0603]  18.29,86.74 180 bottom
R62  100k  [0603]  18.29,95.63 180 bottom
R63  4.7k  [0603]  22.1,86.74 0 bottom
R64  4.7k  [0603]  18.29,88.65 180 bottom
R65  4.7k  [0603]  18.8,101.98 180 top
R66  2.2k  [0603]  12.57,119.13 180 bottom
R67  2.2k  [0603]  12.57,116.59 0 bottom
R68  100k  [0603]  13.21,87.38 270 bottom
R69  100k  [0603]  15.11,87.38 270 bottom
R70  100k  [0603]  17.02,111.51 180 bottom
R71  100k  [0603]  40.39,113.41 180 bottom
R72  5.1k  [0603]  44.2,78.49 180 top
R73  5.1k  [0603]  39.12,78.49 0 top
R74  100k  [0603]  49.66,82.93 180 bottom
R75  100k  [0603]  41.66,86.74 180 bottom
R76  100k  [0603]  41.66,95.63 180 bottom
R77  4.7k  [0603]  45.47,86.74 0 bottom
R78  4.7k  [0603]  41.66,88.65 180 bottom
R79  4.7k  [0603]  42.16,101.98 180 top
R80  2.2k  [0603]  35.94,119.13 180 bottom
R81  2.2k  [0603]  35.94,116.59 0 bottom
R82  100k  [0603]  36.58,87.38 270 bottom
R83  100k  [0603]  38.48,87.38 270 bottom
R84  100k  [0603]  40.39,111.51 180 bottom
R85  100k  [0603]  63.75,113.41 180 bottom
R86  5.1k  [0603]  67.56,78.49 180 top
R87  5.1k  [0603]  62.48,78.49 0 top
R88  100k  [0603]  73.03,82.93 180 bottom
R89  100k  [0603]  65.02,86.74 180 bottom
R90  100k  [0603]  65.02,95.63 180 bottom
R91  4.7k  [0603]  68.83,86.74 0 bottom
R92  4.7k  [0603]  65.02,88.65 180 bottom
R93  4.7k  [0603]  65.53,101.98 180 top
R94  2.2k  [0603]  59.31,119.13 180 bottom
R95  2.2k  [0603]  59.31,116.59 0 bottom
R96  100k  [0603]  59.94,87.38 270 bottom
R97  100k  [0603]  61.85,87.38 270 bottom
R98  100k  [0603]  63.75,111.51 180 bottom
R99  100k  [0603]  87.12,113.41 180 bottom
R100  5.1k  [0603]  90.93,78.49 180 top
R101  5.1k  [0603]  85.85,78.49 0 top
R102  100k  [0603]  96.39,82.93 180 bottom
R103  100k  [0603]  88.39,86.74 180 bottom
R104  100k  [0603]  88.39,95.63 180 bottom
R105  4.7k  [0603]  92.2,86.74 0 bottom
R106  4.7k  [0603]  88.39,88.65 180 bottom
R107  4.7k  [0603]  88.9,101.98 180 top
R108  2.2k  [0603]  82.68,119.13 180 bottom
R109  2.2k  [0603]  82.68,116.59 0 bottom
R110  100k  [0603]  83.31,87.38 270 bottom
R111  100k  [0603]  85.22,87.38 270 bottom
R112  100k  [0603]  87.12,111.51 180 bottom
R113  100k  [0603]  17.02,174.88 180 bottom
R114  5.1k  [0603]  20.83,139.95 180 top
R115  5.1k  [0603]  15.75,139.95 0 top
R116  100k  [0603]  26.29,144.4 180 bottom
R117  100k  [0603]  18.29,148.21 180 bottom
R118  100k  [0603]  18.29,157.1 180 bottom
R119  4.7k  [0603]  22.1,148.21 0 bottom
R120  4.7k  [0603]  18.29,150.11 180 bottom
R121  4.7k  [0603]  18.8,163.45 180 top
R122  2.2k  [0603]  12.57,180.59 180 bottom
R123  2.2k  [0603]  12.57,178.05 0 bottom
R124  100k  [0603]  13.21,148.84 270 bottom
R125  100k  [0603]  15.11,148.84 270 bottom
R126  100k  [0603]  17.02,172.97 180 bottom
R127  100k  [0603]  40.39,174.88 180 bottom
R128  5.1k  [0603]  44.2,139.95 180 top
R129  5.1k  [0603]  39.12,139.95 0 top
R130  100k  [0603]  49.66,144.4 180 bottom
R131  100k  [0603]  41.66,148.21 180 bottom
R132  100k  [0603]  41.66,157.1 180 bottom
R133  4.7k  [0603]  45.47,148.21 0 bottom
R134  4.7k  [0603]  41.66,150.11 180 bottom
R135  4.7k  [0603]  42.16,163.45 180 top
R136  2.2k  [0603]  35.94,180.59 180 bottom
R137  2.2k  [0603]  35.94,178.05 0 bottom
R138  100k  [0603]  36.58,148.84 270 bottom
R139  100k  [0603]  38.48,148.84 270 bottom
R140  100k  [0603]  40.39,172.97 180 bottom
R141  100k  [0603]  63.75,174.88 180 bottom
R142  5.1k  [0603]  67.56,139.95 180 top
R143  5.1k  [0603]  62.48,139.95 0 top
R144  100k  [0603]  73.03,144.4 180 bottom
R145  100k  [0603]  65.02,148.21 180 bottom
R146  100k  [0603]  65.02,157.1 180 bottom
R147  4.7k  [0603]  68.83,148.21 0 bottom
R148  4.7k  [0603]  65.02,150.11 180 bottom
R149  4.7k  [0603]  65.53,163.45 180 top
R150  2.2k  [0603]  59.31,180.59 180 bottom
R151  2.2k  [0603]  59.31,178.05 0 bottom
R152  100k  [0603]  59.94,148.84 270 bottom
R153  100k  [0603]  61.85,148.84 270 bottom
R154  100k  [0603]  63.75,172.97 180 bottom
R155  100k  [0603]  87.12,174.88 180 bottom
R156  5.1k  [0603]  90.93,139.95 180 top
R157  5.1k  [0603]  85.85,139.95 0 top
R158  100k  [0603]  96.39,144.4 180 bottom
R159  100k  [0603]  88.39,148.21 180 bottom
R160  100k  [0603]  88.39,157.1 180 bottom
R161  4.7k  [0603]  92.2,148.21 0 bottom
R162  4.7k  [0603]  88.39,150.11 180 bottom
R163  4.7k  [0603]  88.9,163.45 180 top
R164  2.2k  [0603]  82.68,180.59 180 bottom
R165  2.2k  [0603]  82.68,178.05 0 bottom
R166  100k  [0603]  83.31,148.84 270 bottom
R167  100k  [0603]  85.22,148.84 270 bottom
R168  100k  [0603]  87.12,172.97 180 bottom
RESET  MOMENTARY-SWITCH-SPST-SMD-4.6X2.8MM  [TACTILE_SWITCH_SMD_4.6X2.8MM]  25.91,20.83 0 top
RESET1  MOMENTARY-SWITCH-SPST-SMD-4.6X2.8MM  [TACTILE_SWITCH_SMD_4.6X2.8MM]  49.28,20.83 0 top
RESET2  MOMENTARY-SWITCH-SPST-SMD-4.6X2.8MM  [TACTILE_SWITCH_SMD_4.6X2.8MM]  72.64,20.83 0 top
RESET3  MOMENTARY-SWITCH-SPST-SMD-4.6X2.8MM  [TACTILE_SWITCH_SMD_4.6X2.8MM]  96.01,20.83 0 top
RESET4  MOMENTARY-SWITCH-SPST-SMD-4.6X2.8MM  [TACTILE_SWITCH_SMD_4.6X2.8MM]  25.91,82.3 0 top
RESET5  MOMENTARY-SWITCH-SPST-SMD-4.6X2.8MM  [TACTILE_SWITCH_SMD_4.6X2.8MM]  49.28,82.3 0 top
RESET6  MOMENTARY-SWITCH-SPST-SMD-4.6X2.8MM  [TACTILE_SWITCH_SMD_4.6X2.8MM]  72.64,82.3 0 top
RESET7  MOMENTARY-SWITCH-SPST-SMD-4.6X2.8MM  [TACTILE_SWITCH_SMD_4.6X2.8MM]  96.01,82.3 0 top
RESET8  MOMENTARY-SWITCH-SPST-SMD-4.6X2.8MM  [TACTILE_SWITCH_SMD_4.6X2.8MM]  25.91,143.76 0 top
RESET9  MOMENTARY-SWITCH-SPST-SMD-4.6X2.8MM  [TACTILE_SWITCH_SMD_4.6X2.8MM]  49.28,143.76 0 top
RESET10  MOMENTARY-SWITCH-SPST-SMD-4.6X2.8MM  [TACTILE_SWITCH_SMD_4.6X2.8MM]  72.64,143.76 0 top
RESET11  MOMENTARY-SWITCH-SPST-SMD-4.6X2.8MM  [TACTILE_SWITCH_SMD_4.6X2.8MM]  96.01,143.76 0 top
RGB  JUMPER-SMT_2_NO_SILK  [SMT-JUMPER_2_NO_SILK]  22.73,37.34 90 bottom
RGB1  JUMPER-SMT_2_NO_SILK  [SMT-JUMPER_2_NO_SILK]  46.1,37.34 90 bottom
RGB2  JUMPER-SMT_2_NO_SILK  [SMT-JUMPER_2_NO_SILK]  69.47,37.34 90 bottom
RGB3  JUMPER-SMT_2_NO_SILK  [SMT-JUMPER_2_NO_SILK]  92.84,37.34 90 bottom
RGB4  JUMPER-SMT_2_NO_SILK  [SMT-JUMPER_2_NO_SILK]  22.73,98.81 90 bottom
RGB5  JUMPER-SMT_2_NO_SILK  [SMT-JUMPER_2_NO_SILK]  46.1,98.81 90 bottom
RGB6  JUMPER-SMT_2_NO_SILK  [SMT-JUMPER_2_NO_SILK]  69.47,98.81 90 bottom
RGB7  JUMPER-SMT_2_NO_SILK  [SMT-JUMPER_2_NO_SILK]  92.84,98.81 90 bottom
RGB8  JUMPER-SMT_2_NO_SILK  [SMT-JUMPER_2_NO_SILK]  22.73,160.27 90 bottom
RGB9  JUMPER-SMT_2_NO_SILK  [SMT-JUMPER_2_NO_SILK]  46.1,160.27 90 bottom
RGB10  JUMPER-SMT_2_NO_SILK  [SMT-JUMPER_2_NO_SILK]  69.47,160.27 90 bottom
RGB11  JUMPER-SMT_2_NO_SILK  [SMT-JUMPER_2_NO_SILK]  92.84,160.27 90 bottom
SD_DET  JUMPER-SMT_2_NC_TRACE_SILK  [SMT-JUMPER_2_NC_TRACE_SILK]  15.75,40.51 180 bottom
SD_DET1  JUMPER-SMT_2_NC_TRACE_SILK  [SMT-JUMPER_2_NC_TRACE_SILK]  39.12,40.51 180 bottom
SD_DET2  JUMPER-SMT_2_NC_TRACE_SILK  [SMT-JUMPER_2_NC_TRACE_SILK]  62.48,40.51 180 bottom
SD_DET3  JUMPER-SMT_2_NC_TRACE_SILK  [SMT-JUMPER_2_NC_TRACE_SILK]  85.85,40.51 180 bottom
SD_DET4  JUMPER-SMT_2_NC_TRACE_SILK  [SMT-JUMPER_2_NC_TRACE_SILK]  15.75,101.98 180 bottom
SD_DET5  JUMPER-SMT_2_NC_TRACE_SILK  [SMT-JUMPER_2_NC_TRACE_SILK]  39.12,101.98 180 bottom
SD_DET6  JUMPER-SMT_2_NC_TRACE_SILK  [SMT-JUMPER_2_NC_TRACE_SILK]  62.48,101.98 180 bottom
SD_DET7  JUMPER-SMT_2_NC_TRACE_SILK  [SMT-JUMPER_2_NC_TRACE_SILK]  85.85,101.98 180 bottom
SD_DET8  JUMPER-SMT_2_NC_TRACE_SILK  [SMT-JUMPER_2_NC_TRACE_SILK]  15.75,163.45 180 bottom
SD_DET9  JUMPER-SMT_2_NC_TRACE_SILK  [SMT-JUMPER_2_NC_TRACE_SILK]  39.12,163.45 180 bottom
SD_DET10  JUMPER-SMT_2_NC_TRACE_SILK  [SMT-JUMPER_2_NC_TRACE_SILK]  62.48,163.45 180 bottom
SD_DET11  JUMPER-SMT_2_NC_TRACE_SILK  [SMT-JUMPER_2_NC_TRACE_SILK]  85.85,163.45 180 bottom
SHLD  JUMPER-SMT_2_NC_TRACE_SILK  [SMT-JUMPER_2_NC_TRACE_SILK]  24.64,15.75 90 bottom
SHLD1  JUMPER-SMT_2_NC_TRACE_SILK  [SMT-JUMPER_2_NC_TRACE_SILK]  48.01,15.75 90 bottom
SHLD2  JUMPER-SMT_2_NC_TRACE_SILK  [SMT-JUMPER_2_NC_TRACE_SILK]  71.37,15.75 90 bottom
SHLD3  JUMPER-SMT_2_NC_TRACE_SILK  [SMT-JUMPER_2_NC_TRACE_SILK]  94.74,15.75 90 bottom
SHLD4  JUMPER-SMT_2_NC_TRACE_SILK  [SMT-JUMPER_2_NC_TRACE_SILK]  24.64,77.22 90 bottom
SHLD5  JUMPER-SMT_2_NC_TRACE_SILK  [SMT-JUMPER_2_NC_TRACE_SILK]  48.01,77.22 90 bottom
SHLD6  JUMPER-SMT_2_NC_TRACE_SILK  [SMT-JUMPER_2_NC_TRACE_SILK]  71.37,77.22 90 bottom
SHLD7  JUMPER-SMT_2_NC_TRACE_SILK  [SMT-JUMPER_2_NC_TRACE_SILK]  94.74,77.22 90 bottom
SHLD8  JUMPER-SMT_2_NC_TRACE_SILK  [SMT-JUMPER_2_NC_TRACE_SILK]  24.64,138.68 90 bottom
SHLD9  JUMPER-SMT_2_NC_TRACE_SILK  [SMT-JUMPER_2_NC_TRACE_SILK]  48.01,138.68 90 bottom
SHLD10  JUMPER-SMT_2_NC_TRACE_SILK  [SMT-JUMPER_2_NC_TRACE_SILK]  71.37,138.68 90 bottom
SHLD11  JUMPER-SMT_2_NC_TRACE_SILK  [SMT-JUMPER_2_NC_TRACE_SILK]  94.74,138.68 90 bottom
U1  ESP32-C6-WROOM-1-NARROW  [ESP32-C6-WROOM-1-NARROW]  18.29,55.12 0 top
U2  RT9080-33GJ5  [SOT23-5]  18.29,37.34 0 top
U3  MCP73831  [SOT23-5]  22.1,25.91 180 top
U4  MAX17048  [DFN-8]  13.21,36.07 90 top
U5  ESP32-C6-WROOM-1-NARROW  [ESP32-C6-WROOM-1-NARROW]  41.66,55.12 0 top
U6  RT9080-33GJ5  [SOT23-5]  41.66,37.34 0 top
U7  MCP73831  [SOT23-5]  45.47,25.91 180 top
U8  MAX17048  [DFN-8]  36.58,36.07 90 top
U9  ESP32-C6-WROOM-1-NARROW  [ESP32-C6-WROOM-1-NARROW]  65.02,55.12 0 top
U10  RT9080-33GJ5  [SOT23-5]  65.02,37.34 0 top
U11  MCP73831  [SOT23-5]  68.83,25.91 180 top
U12  MAX17048  [DFN-8]  59.94,36.07 90 top
U13  ESP32-C6-WROOM-1-NARROW  [ESP32-C6-WROOM-1-NARROW]  88.39,55.12 0 top
U14  RT9080-33GJ5  [SOT23-5]  88.39,37.34 0 top
U15  MCP73831  [SOT23-5]  92.2,25.91 180 top
U16  MAX17048  [DFN-8]  83.31,36.07 90 top
U17  ESP32-C6-WROOM-1-NARROW  [ESP32-C6-WROOM-1-NARROW]  18.29,116.59 0 top
U18  RT9080-33GJ5  [SOT23-5]  18.29,98.81 0 top
U19  MCP73831  [SOT23-5]  22.1,87.38 180 top
U20  MAX17048  [DFN-8]  13.21,97.54 90 top
U21  ESP32-C6-WROOM-1-NARROW  [ESP32-C6-WROOM-1-NARROW]  41.66,116.59 0 top
U22  RT9080-33GJ5  [SOT23-5]  41.66,98.81 0 top
U23  MCP73831  [SOT23-5]  45.47,87.38 180 top
U24  MAX17048  [DFN-8]  36.58,97.54 90 top
U25  ESP32-C6-WROOM-1-NARROW  [ESP32-C6-WROOM-1-NARROW]  65.02,116.59 0 top
U26  RT9080-33GJ5  [SOT23-5]  65.02,98.81 0 top
U27  MCP73831  [SOT23-5]  68.83,87.38 180 top
U28  MAX17048  [DFN-8]  59.94,97.54 90 top
U29  ESP32-C6-WROOM-1-NARROW  [ESP32-C6-WROOM-1-NARROW]  88.39,116.59 0 top
U30  RT9080-33GJ5  [SOT23-5]  88.39,98.81 0 top
U31  MCP73831  [SOT23-5]  92.2,87.38 180 top
U32  MAX17048  [DFN-8]  83.31,97.54 90 top
U33  ESP32-C6-WROOM-1-NARROW  [ESP32-C6-WROOM-1-NARROW]  18.29,178.05 0 top
U34  RT9080-33GJ5  [SOT23-5]  18.29,160.27 0 top
U35  MCP73831  [SOT23-5]  22.1,148.84 180 top
U36  MAX17048  [DFN-8]  13.21,159 90 top
U37  ESP32-C6-WROOM-1-NARROW  [ESP32-C6-WROOM-1-NARROW]  41.66,178.05 0 top
U38  RT9080-33GJ5  [SOT23-5]  41.66,160.27 0 top
U39  MCP73831  [SOT23-5]  45.47,148.84 180 top
U40  MAX17048  [DFN-8]  36.58,159 90 top
U41  ESP32-C6-WROOM-1-NARROW  [ESP32-C6-WROOM-1-NARROW]  65.02,178.05 0 top
U42  RT9080-33GJ5  [SOT23-5]  65.02,160.27 0 top
U43  MCP73831  [SOT23-5]  68.83,148.84 180 top
U44  MAX17048  [DFN-8]  59.94,159 90 top
U45  ESP32-C6-WROOM-1-NARROW  [ESP32-C6-WROOM-1-NARROW]  88.39,178.05 0 top
U46  RT9080-33GJ5  [SOT23-5]  88.39,160.27 0 top
U47  MCP73831  [SOT23-5]  92.2,148.84 180 top
U48  MAX17048  [DFN-8]  83.31,159 90 top
U$1  [#SHLD#0]  24.64,14.99 90 bottom
U$2  [#I�C#0]  16.76,56.39 0 bottom
U$3  [#_IO18#0]  8.38,41.15 0 top
U$4  [#_VUSB#0]  8.38,38.61 0 top
U$5  [#_VBAT#0]  8.38,33.53 0 top
U$6  [#_EN#0]  8.38,36.07 0 top
U$7  [#IO3_#0]  28.19,41.15 0 top
U$8  [#IO2_#0]  28.19,38.61 0 top
U$9  [#IO1_#0]  28.19,36.07 0 top
U$10  [#IO0_#0]  28.19,33.53 0 top
U$11  [#GND_#0]  28.19,30.99 0 top
U$12  [#3V3_#0]  28.19,25.91 0 top
U$13  [##RST#_#0]  28.19,23.37 0 top
U$14  [#SDA#IO6_#0]  8.38,61.47 0 bottom
U$15  [#SCL#IO7_#0]  8.38,58.93 0 bottom
U$16  [#_IO21#POCI#0]  28.19,53.85 0 bottom
U$17  [#LP#0]  13.72,28.45 0 bottom
U$18  [#IO8_#0]  8.38,51.31 0 bottom
U$19  [#IO10_#0]  8.38,48.77 0 bottom
U$20  [#IO11_#0]  8.38,46.23 0 bottom
U$21  [#_IO19#SCK#0]  28.19,48.77 0 bottom
U$22  [#IO18_#0]  8.38,41.15 0 bottom
U$23  [#_IO9#0]  28.19,61.47 0 bottom
U$24  [#_IO16#TX#0]  28.19,58.93 0 bottom
U$25  [#_IO17#RX#0]  28.19,56.39 0 bottom
U$26  [#_IO20#PICO#0]  28.19,51.44 0 bottom
U$27  [#IO15#0]  14.48,29.21 90 bottom
U$28  [#ALRT#0]  14.48,49.53 90 bottom
U$29  [#_IO5#0]  28.19,46.23 0 bottom
U$30  [#_IO4#0]  28.19,43.69 0 bottom
U$31  [#_IO3#0]  28.19,41.15 0 bottom
U$32  [#_IO2#0]  28.19,38.61 0 bottom
U$33  [#_IO1#0]  28.19,36.07 0 bottom
U$34  [#_IO0#0]  28.19,33.53 0 bottom
U$35  [#_GND#0]  28.19,30.99 0 bottom
U$36  [#_3V3#0]  28.19,25.91 0 bottom
U$37  [##RST#_#0]  28.45,23.11 90 bottom
U$38  [#VUSB_#0]  8.38,38.61 0 bottom
U$39  [#VBAT_#0]  8.38,33.53 0 bottom
U$40  [#EN_#0]  8.38,36.07 0 bottom
U$41  [#SD_DET#0]  16.51,40.51 0 bottom
U$42  [BOOT0]  26.04,14.86 0 top
U$43  [RST0]  29.08,20.95 90 top
U$44  [IO90]  29.08,17.02 90 top
U$45  [THING_PLUS0]  18.29,19.94 0 top
U$46  [ESP32#C60]  18.29,18.29 0 top
U$47  [THING_PLUS0]  18.29,46.86 0 bottom
U$48  [ESP32#C60]  18.29,44.96 0 bottom
U$49  [#MEAS#0]  18.29,32.64 0 top
U$50  [#MEAS#0]  18.29,32.64 0 bottom
U$51  [#CHG#0]  21.46,28.45 0 bottom
U$52  [#PWR#0]  19.81,42.42 0 bottom
U$53  [PWR0]  15.11,41.66 0 top
U$54  [CHG0]  21.72,32.26 90 top
U$55  [STAT0]  22.1,41.66 0 top
U$56  [#RGB#0]  22.73,36.58 90 bottom
U$57  [#SHLD#0]  48.01,14.99 90 bottom
U$58  [#RGB_#0]  28.19,28.45 0 top
U$59  [#_RGB#0]  28.19,28.45 0 bottom
U$60  [#I�C#0]  40.13,56.39 0 bottom
U$61  [#_IO18#0]  31.75,41.15 0 top
U$62  [IO230]  22.1,37.85 0 top
U$63  [#G#0]  15.75,29.21 90 bottom
U$64  [#IO23_#0]  8.38,53.85 0 bottom
U$65  [#IO15_#0]  8.38,56.39 0 bottom
U$66  [#IO22_#0]  8.38,43.69 0 bottom
U$67  [#_VUSB#0]  31.75,38.61 0 top
U$68  [#_VBAT#0]  31.75,33.53 0 top
U$69  [#_EN#0]  31.75,36.07 0 top
U$70  [#IO3_#0]  51.56,41.15 0 top
U$71  [#IO2_#0]  51.56,38.61 0 top
U$72  [#IO1_#0]  51.56,36.07 0 top
U$73  [#IO0_#0]  51.56,33.53 0 top
U$74  [#GND_#0]  51.56,30.99 0 top
U$75  [#3V3_#0]  51.56,25.91 0 top
U$76  [##RST#_#0]  51.56,23.37 0 top
U$77  [#SDA#IO6_#0]  31.75,61.47 0 bottom
U$78  [#SCL#IO7_#0]  31.75,58.93 0 bottom
U$79  [#IO8_#0]  31.75,51.31 0 bottom
U$80  [#IO10_#0]  31.75,48.77 0 bottom
U$81  [#IO11_#0]  31.75,46.23 0 bottom
U$82  [#IO18_#0]  31.75,41.15 0 bottom
U$83  [#_IO9#0]  51.56,61.47 0 bottom
U$84  [#_IO16#TX#0]  51.56,58.93 0 bottom
U$85  [#_IO17#RX#0]  51.56,56.39 0 bottom
U$86  [#_IO5#0]  51.56,46.23 0 bottom
U$87  [#_IO4#0]  51.56,43.69 0 bottom
U$88  [#_IO3#0]  51.56,41.15 0 bottom
U$89  [#_IO2#0]  51.56,38.61 0 bottom
U$90  [#_IO1#0]  51.56,36.07 0 bottom
U$91  [#_IO0#0]  51.56,33.53 0 bottom
U$92  [#_GND#0]  51.56,30.99 0 bottom
U$93  [#_3V3#0]  51.56,25.91 0 bottom
U$94  [#VUSB_#0]  31.75,38.61 0 bottom
U$95  [#VBAT_#0]  31.75,33.53 0 bottom
U$96  [#EN_#0]  31.75,36.07 0 bottom
U$97  [##RST#_#0]  51.82,23.11 90 bottom
U$98  [#SD_DET#0]  39.88,40.51 0 bottom
U$99  [BOOT0]  49.4,14.86 0 top
U$100  [RST0]  52.45,20.95 90 top
U$101  [IO90]  52.45,17.02 90 top
U$102  [THING_PLUS0]  41.66,19.94 0 top
U$103  [ESP32#C60]  41.66,18.29 0 top
U$104  [THING_PLUS0]  41.66,46.86 0 bottom
U$105  [ESP32#C60]  41.66,44.96 0 bottom
U$106  [#MEAS#0]  41.66,32.64 0 top
U$107  [#MEAS#0]  41.66,32.64 0 bottom
U$108  [#CHG#0]  44.83,28.45 0 bottom
U$109  [#PWR#0]  43.18,42.42 0 bottom
U$110  [PWR0]  38.48,41.66 0 top
U$111  [CHG0]  45.08,32.26 90 top
U$112  [STAT0]  45.47,41.66 0 top
U$113  [#RGB#0]  46.1,36.58 90 bottom
U$114  [#RGB_#0]  51.56,28.45 0 top
U$115  [#_RGB#0]  51.56,28.45 0 bottom
U$116  [#G#0]  39.12,29.21 90 bottom
U$117  [IO230]  45.47,37.85 0 top
U$118  [#IO15_#0]  31.75,56.39 0 bottom
U$119  [#IO23_#0]  31.75,53.85 0 bottom
U$120  [#IO22_#0]  31.75,43.69 0 bottom
U$121  [#_IO21#POCI#0]  51.56,53.85 0 bottom
U$122  [#_IO19#SCK#0]  51.56,48.77 0 bottom
U$123  [#_IO20#PICO#0]  51.56,51.44 0 bottom
U$124  [#LP#0]  37.08,28.45 0 bottom
U$125  [#IO15#0]  37.85,29.21 90 bottom
U$126  [#ALRT#0]  37.85,49.53 90 bottom
U$127  [#SHLD#0]  71.37,14.99 90 bottom
U$128  [#I�C#0]  63.5,56.39 0 bottom
U$129  [#_IO18#0]  55.12,41.15 0 top
U$130  [#_VUSB#0]  55.12,38.61 0 top
U$131  [#_VBAT#0]  55.12,33.53 0 top
U$132  [#_EN#0]  55.12,36.07 0 top
U$133  [#IO3_#0]  74.93,41.15 0 top
U$134  [#IO2_#0]  74.93,38.61 0 top
U$135  [#IO1_#0]  74.93,36.07 0 top
U$136  [#IO0_#0]  74.93,33.53 0 top
U$137  [#GND_#0]  74.93,30.99 0 top
U$138  [#3V3_#0]  74.93,25.91 0 top
U$139  [##RST#_#0]  74.93,23.37 0 top
U$140  [#SDA#IO6_#0]  55.12,61.47 0 bottom
U$141  [#SCL#IO7_#0]  55.12,58.93 0 bottom
U$142  [#IO8_#0]  55.12,51.31 0 bottom
U$143  [#IO10_#0]  55.12,48.77 0 bottom
U$144  [#IO11_#0]  55.12,46.23 0 bottom
U$145  [#IO18_#0]  55.12,41.15 0 bottom
U$146  [#_IO9#0]  74.93,61.47 0 bottom
U$147  [#_IO16#TX#0]  74.93,58.93 0 bottom
U$148  [#_IO17#RX#0]  74.93,56.39 0 bottom
U$149  [#_IO5#0]  74.93,46.23 0 bottom